# Altium PCB NS6202_V4.0_b.PcbDoc
Units mm, origin at the board's own origin, x right, y up, seen from the top; angles counter-clockwise.
Board outline 66 x 66 mm, 4 copper layers (Top, PWR, GND, Bottom), stack 0.776 mm thick; 111 components, 136 nets, 475 pads, 226 vias.
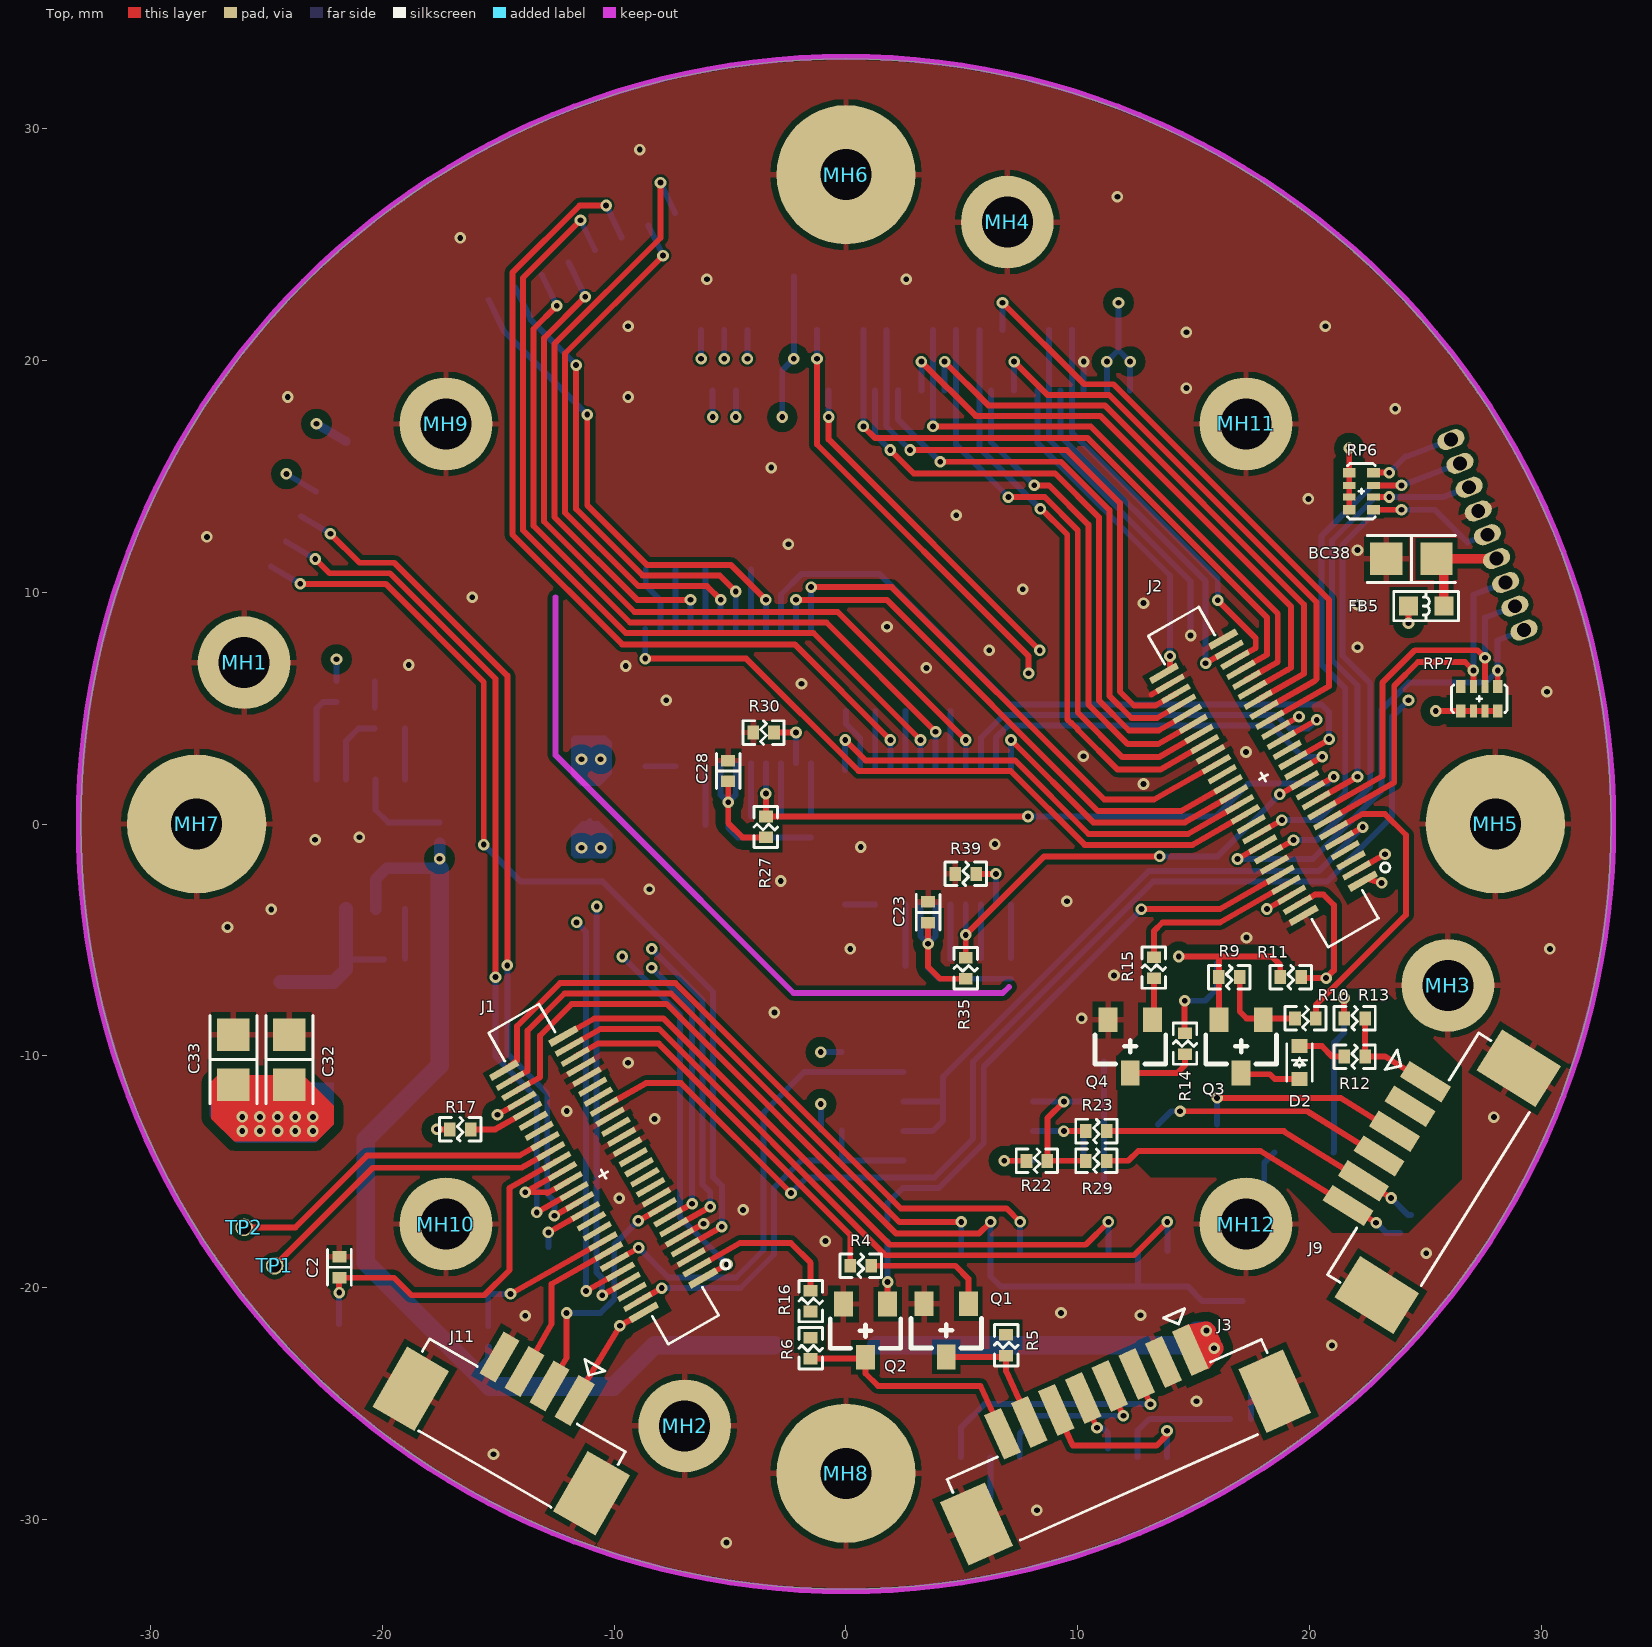
[diagram p0: Top view]
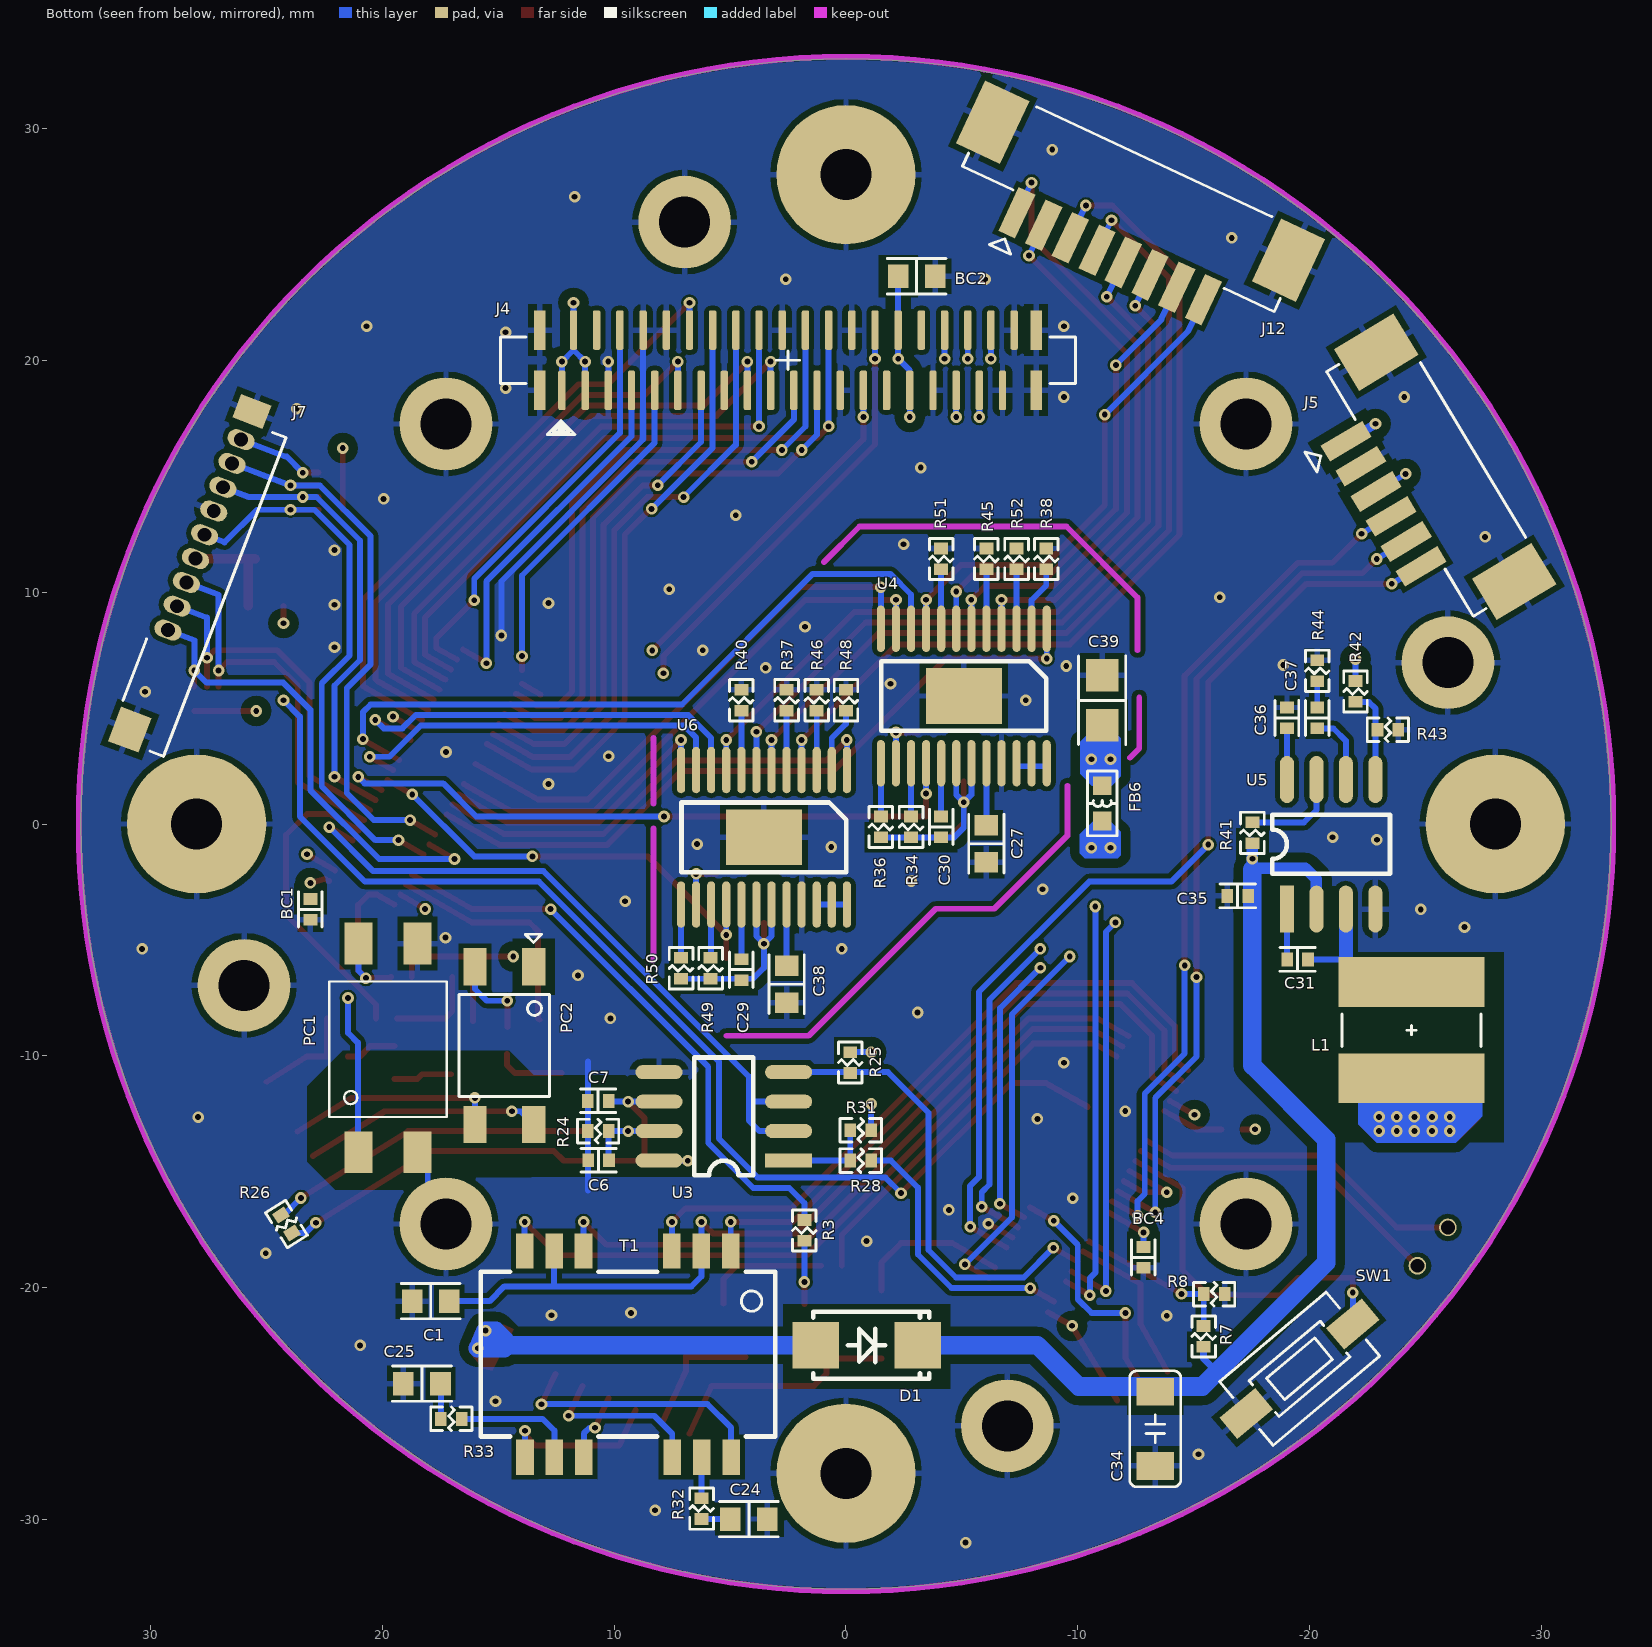
[diagram p1: Bottom view, seen from below]
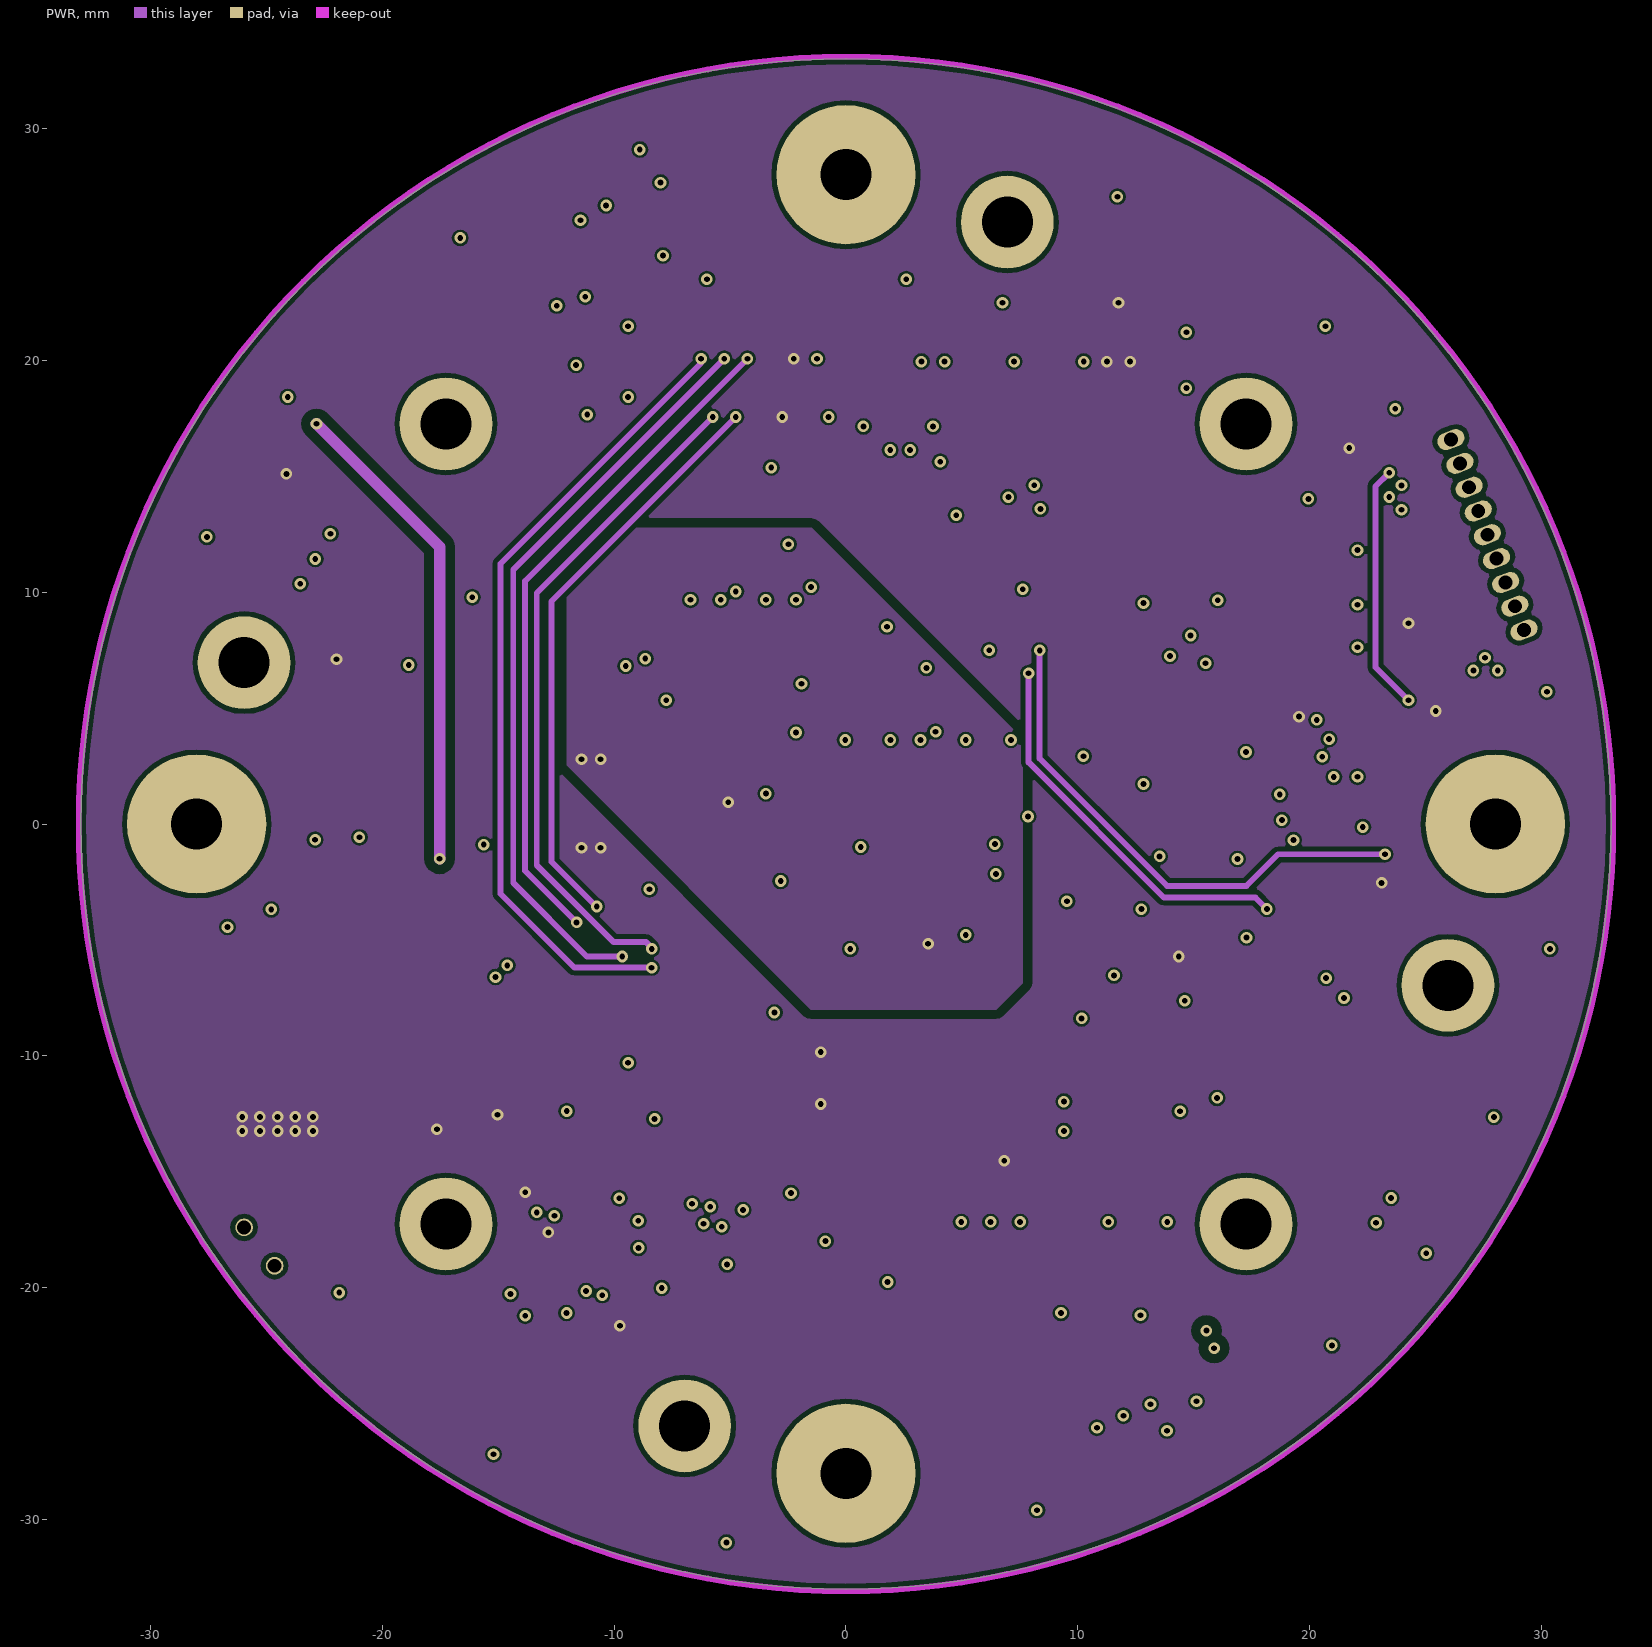
[diagram p2: PWR]
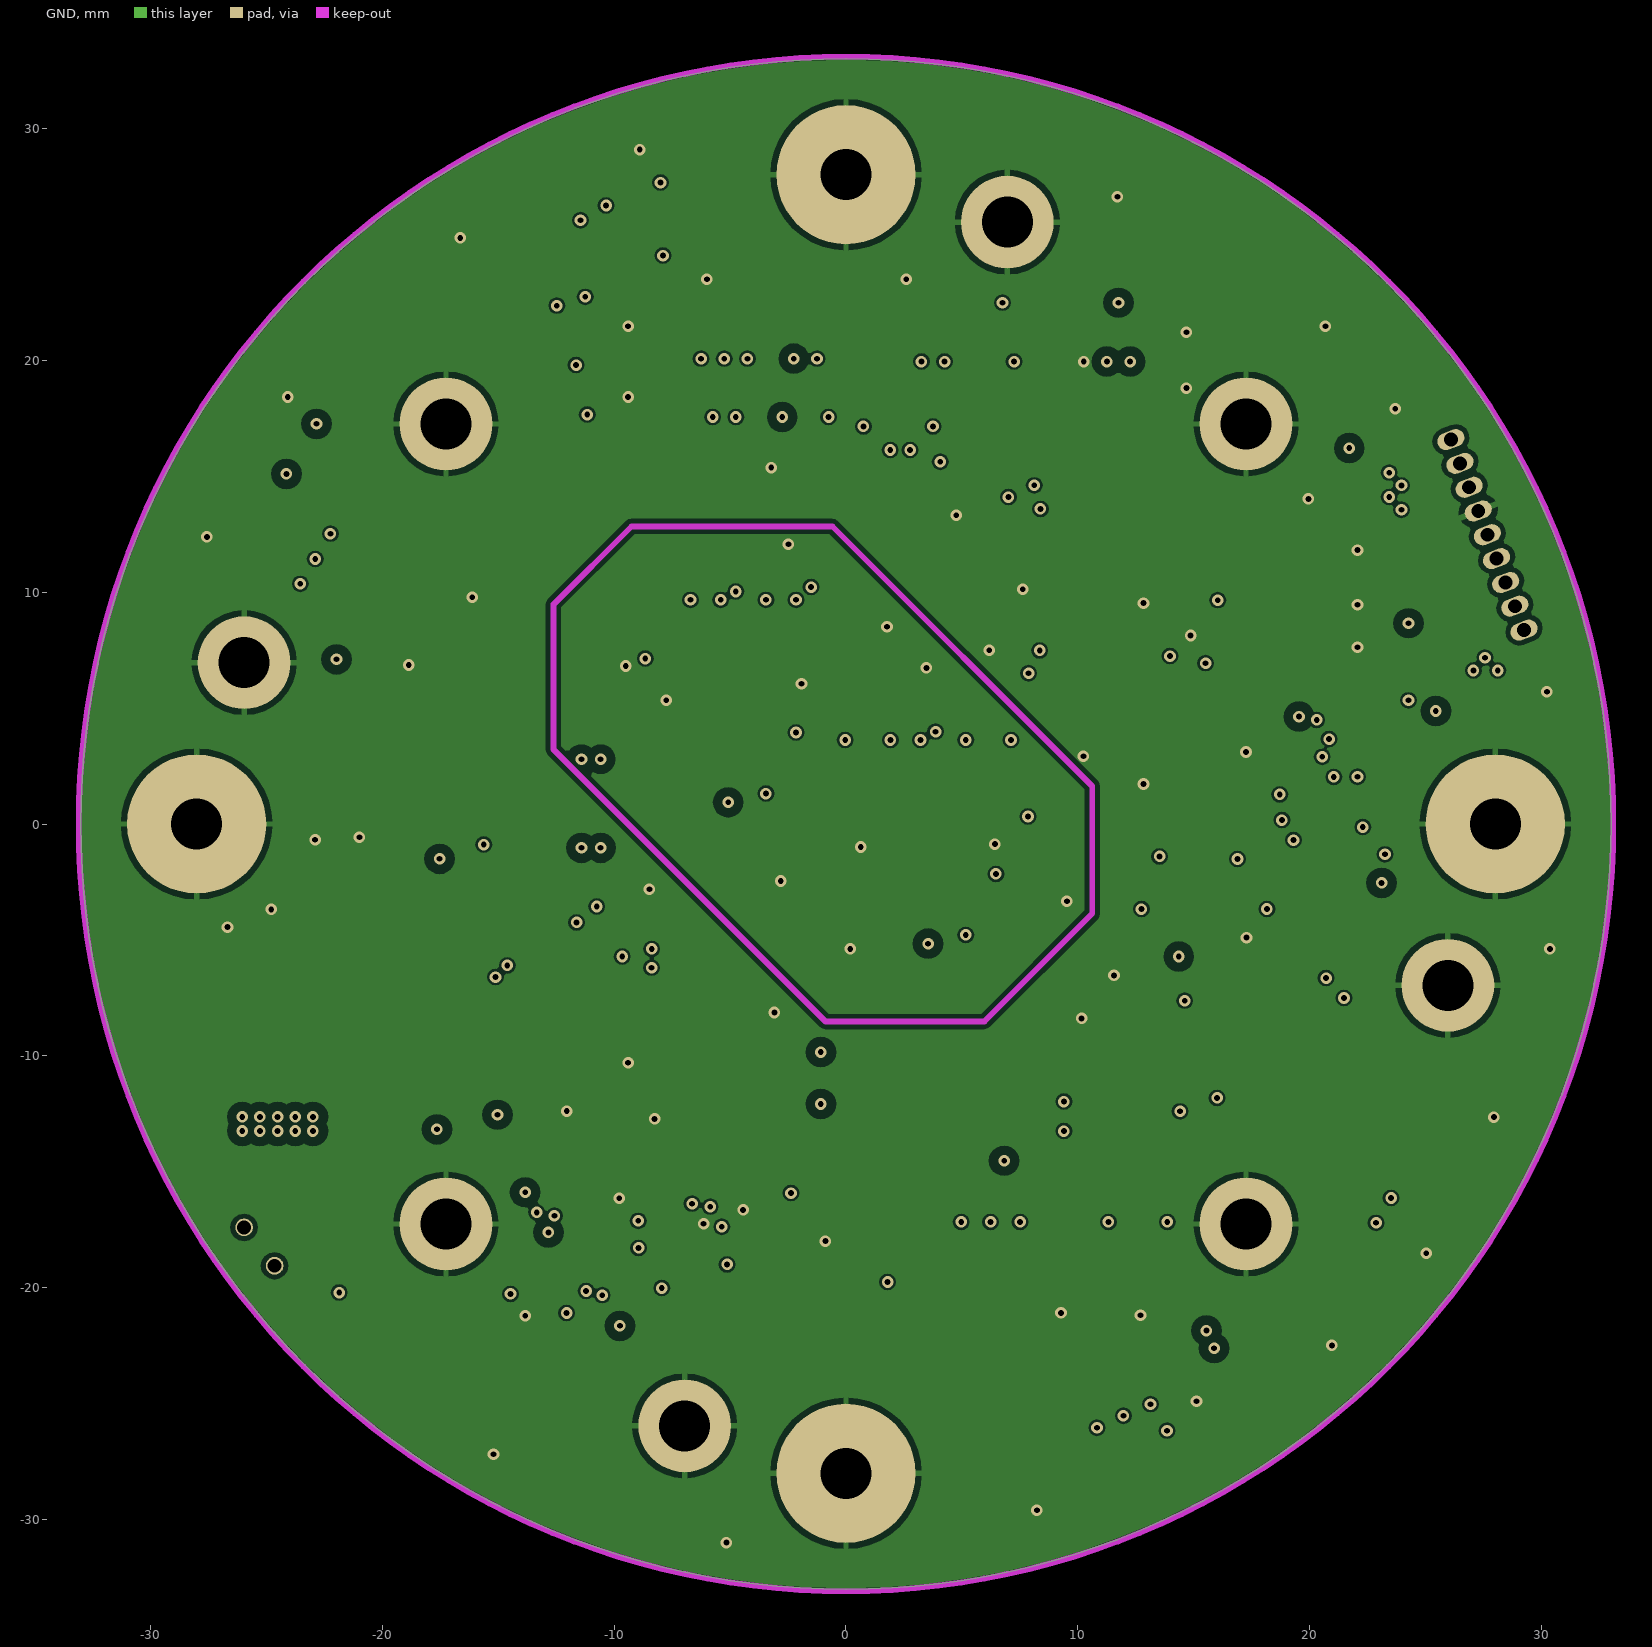
[diagram p3: GND]

## Layer stack, top to bottom
Solder Mask Top: solder mask 0.0102, Solder Resist, Dk 3.5
Top: signal copper 0.0343
Dielectric 1: core 0.254, FR-4, Dk 4.2
PWR: signal copper 0.036
Dielectric 3: prepreg 0.127, Dk 4.2
GND: signal copper 0.036
Dielectric 2: core 0.254, Dk 4.2
Bottom: signal copper 0.0343
Solder Mask Bottom: solder mask 0.0102, Solder Resist, Dk 3.5

## Board outline
-33,0 ccw(c0,0) 0,-33 ccw(c0,0) 33,0 ccw(c0,0) 0,33 ccw(c0,0)

## Design rules (kind name [scope] priority, off if disabled: settings)
Clearance Clearance_4 [OnLayer('Keep-Out Layer') vs InNet('GND')] p1: gap=0.001 ignorepadtopadclearanceinfootprint=FALSE except(0: Arc-Hole Track-Hole SMDPad-Hole THPad-Hole Via-Hole Fill-Hole Poly-Hole Region-Hole Text-Hole)
Clearance Clearance_3 [IsRegion vs (InNet('+12V') OR InNet('+12V_POE') OR InNet('+3.3V')OR InNet('+1.8V') or Innet('+5.0V')or Innet('N17346698') or Innet('N17371906') or Innet('MVDD'))] p2: gap=0.4 ignorepadtopadclearanceinfootprint=FALSE except(0: Arc-Hole Track-Hole SMDPad-Hole THPad-Hole Via-Hole Fill-Hole Poly-Hole Region-Hole Text-Hole)
Clearance Clearance_2 [(InComponent('RP6') OR InComponent('RP7'))] p3: gap=0.16 ignorepadtopadclearanceinfootprint=FALSE except(0: Arc-Hole Track-Hole SMDPad-Hole THPad-Hole Via-Hole Fill-Hole Poly-Hole Region-Hole Text-Hole)
Clearance Clearance_1 [IsVia] p4: gap=0.1 ignorepadtopadclearanceinfootprint=FALSE except(0: Arc-Hole Track-Hole SMDPad-Hole THPad-Hole Via-Hole Fill-Hole Poly-Hole Region-Hole Text-Hole)
Clearance [All] p5: gap=0.2 ignorepadtopadclearanceinfootprint=FALSE except(0: Arc-Hole Track-Hole SMDPad-Hole THPad-Hole Via-Hole Fill-Hole Poly-Hole Region-Hole Text-Hole)
ComponentClearance ComponentClearance_1 [(InComponent('J1') or InComponent('J2') or InComponent('J3') or InComponent('J4') or InComponent('J5') or InComponent('J7') or InComponent('J9') or InComponent('J11') or InComponent('J12') or InComponent('SW1'))] p1: gap=0 collisioncheckmode=3 verticalgap=0 showdistances=FALSE
ComponentClearance [All] p2: gap=0.1 collisioncheckmode=3 verticalgap=0 showdistances=FALSE
HoleSize [All] p1: absolutevalues=TRUE maxlimit=3.27 minlimit=0.025 maxpercent=80.000 minpercent=20.000
HoleToHoleClearance [All] p1: gap=0.01 allowstackedmicrovias=TRUE
MinimumSolderMaskSliver [All] p1: minsoldermaskwidth=0.01
PlaneConnect "Power Plane Connect Style - pads with no thermal_2" [(Name='U44-1') Or (Name='U45-1') Or (Name='U46-1') Or (Name='U47-1') Or (Name='U48-1') Or (Name='U49-1') Or (Name='U50-1') Or (Name='U51-1') Or (Name='U52-1') Or (Name='U55-1') Or (Name='U56-1') Or (Name='U57-1') Or (Name='U58-1') Or (Name='U6-1') Or (Name='U7-1') Or (Name='U8-1') Or (Name='U9-1')] p1: planeconnectstyle=NoConnect reliefexpansion=0.508 reliefentries=4 reliefconductorwidth=0.254 reliefairgap=0.254 // PAD - No Thermal Connect Rule
PlaneConnect "Power Plane Connect Style - pads with no thermal" [(Name='J10-0') Or (Name='J10-0/2') Or (Name='J11-0') Or (Name='J11-0/2') Or (Name='J13-6') Or (Name='J13-7') Or (Name='J2-13') Or (Name='J2-14') Or (Name='J4-15') Or (Name='J4-16') Or (Name='J6-5') Or (Name='J6-6') Or (Name='J6-9') Or (Name='J6-10') Or (Name='LS1-5') Or (Name='LS1-6') Or (Name='LS1-7') Or (Name='SW1-1') Or (Name='SW1-4') Or (Name='U10-1') Or (Name='U11-1') Or (Name='U12-1') Or (Name='U13-1') Or (Name='U14-1') Or (Name='U15-1') Or (Name='U16-1') Or (Name='U17-1') Or (Name='U18-1') Or (Name='U19-1') Or (Name='U20-1') Or (Name='U21-1') Or (Name='U22-1') Or (Name='U23-1') Or (Name='U24-1') Or (Name='U25-1') Or (Name='U26-1') Or (Name='U27-1') Or (Name='U28-1') Or (Name='U29-1') Or (Name='U30-1') Or (Name='U31-1') Or (Name='U32-1') Or (Name='U33-1') Or (Name='U34-1') Or (Name='U35-1') Or (Name='U36-1') Or (Name='U37-1') Or (Name='U38-1') Or (Name='U39-1') Or (Name='U40-1') Or (Name='U41-1') Or (Name='U42-1') Or (Name='U43-1')] p2: planeconnectstyle=NoConnect reliefexpansion=0.508 reliefentries=4 reliefconductorwidth=0.254 reliefairgap=0.254 // PAD - No Thermal Connect Rule
PlaneConnect [All] p3: planeconnectstyle=Relief reliefexpansion=0.508 reliefentries=4 reliefconductorwidth=0.254 reliefairgap=0.254
PolygonConnect PolygonConnect_1 [isVia] p1: connectstyle=Direct reliefconductorwidth=0.254 reliefentries=4 polygonreliefangle="90 Angle" airgapwidth=0.254
PolygonConnect [All] p2: connectstyle=Relief reliefconductorwidth=0.254 reliefentries=4 polygonreliefangle="90 Angle" airgapwidth=0.254
RoutingVias [All] p1: holewidth=0.25 width=0.5 viastyle="Through Hole" minholewidth=0.25 minwidth=0.5 maxholewidth=0.25 maxwidth=0.5
SilkToBoardRegionClearance [All] p1 off:
SilkToSilkClearance [All] p1: silktosilkclearance=0.01
SilkToSolderMaskClearance SilkToSolderMaskClearance_1 [OnLayer('Multi-Layer')] p1: minsilkscreentomaskgap=0 clearancetoexposedcopper=TRUE
SilkToSolderMaskClearance [IsPad] p2: minsilkscreentomaskgap=0.01 clearancetoexposedcopper=TRUE
SolderMaskExpansion [All] p1: expansion=0.102
UnRoutedNet [All] p1: checkbadconnections=TRUE
Width Width_2 [InNet('VDD_3.3V')  or InNet('VDD_5.0V')] p1: maxlimit=3 minlimit=0.254 preferedwidth=2.4
Width Width_1 [InNet('+12V')] p2: maxlimit=1 minlimit=0.3 preferedwidth=0.5
Width [All] p3: maxlimit=1 minlimit=0.254 preferedwidth=0.254
21 further rules are at their usual default settings.

## Components (designator, comment, footprint, x,y, rotation, side; value= is the part's Value field where it differs from the comment)
BC1 "0.1uF" CS-1005 23.097,-3.683 r90 bottom
BC2 "0.1uF" CS-1608 -3.048,23.622 r0 bottom
BC4 "0.1uF" CS-1005 -12.824,-18.691 r90 bottom
BC38 "22uF" CS-2012 24.384,11.43 r0 top
C1 "0.1uF" CS-1608 17.907,-20.574 r0 bottom
C2 "1nF/NI" CS-1005 -21.844,-19.115 r90 top
C6 "2.2nF" CS-1005 10.668,-14.502 r180 bottom
C7 "2.2nF" CS-1005 10.689,-11.938 r180 bottom
C23 "0.1uF" CS-1005 3.538,-3.81 r90 top
C24 "0.1uF" CS-1608 4.191,-29.972 r180 bottom
C25 "0.1uF" CS-1608 18.287,-24.13 r0 bottom
C27 "2.2uF" CS-1608 -6.055,-0.851 r270 bottom
C28 "0.1uF" CS-1005 -5.08,2.286 r90 top
C29 "10nF" CS-1005 4.513,-6.281 r270 bottom
C30 "10nF" CS-1005 -4.105,-0.127 r270 bottom
C31 "10nF" CS-1005 -19.471,-5.842 r180 bottom
C32 "22uF-2012-6.3V" CS-2012 -24.003,-10.16 r90 top
C33 "22uF-2012-6.3V" CS-2012 -26.416,-10.16 r90 top
C34 "4.7uF-25V" C3216 -13.335,-26.081 r270 bottom
C35 "0.1uF" CS-1005 -16.891,-3.102 r0 bottom
C36 "0.1uF" CS-1005 -19.016,4.572 r90 bottom
C37 "3.3nF" CS-1005 -20.32,4.572 r90 bottom
C38 "2.2uF" CS-1608 2.563,-6.909 r270 bottom
C39 "22uF" CS-2012 -11.049,5.334 r90 bottom
D1 "RB051L-40" SOD-106 -0.889,-22.479 r180 bottom
D2 "1N4148" SOD-523 19.558,-10.287 r270 top
FB5 "60" LS-1608 25.019,9.398 r0 top
FB6 "60" LS-1608 -11.049,0.889 r270 bottom
J1 "AXK6F30547" AXK6F50547 -10.451,-15.098 r120 top locked
J2 "AXK6F50347" AXK6F50547 18.001,2.021 r120 top locked
J3 "12505WS-08" 12505WS-8P#1 11.43,-25.908 r24 top
J4 "05005HS-40" 05005HS-40P 2.5,20 r180 bottom
J5 "12505WS-06" 12505WS-6P -24.511,14.605 r239 bottom
J7 "CON_u-SD/NI" CON_U-SD-RU 29.237,8.359 r111 bottom
J9 "12505WS-06" 12505WS-6P 24.638,-14.605 r238 top
J11 "12505WS-4P//NI" 12505WS-4P -14.097,-25.266 r330 top
J12 "12505WS-08" 12505WS-8P#2 -12.047,25.885 r205 bottom
L1 "CDRH5D18NP-100NC-10uH" CDRH5D18NP -24.384,-8.89 r0 bottom
MH1 "4.04pi" VA-2.2 -25.954,6.954 r0 top locked
MH2 "4.04pi" VA-2.2 -6.954,-25.954 r0 top locked
MH3 "4.04pi" VA-2.2 25.954,-6.954 r0 top locked
MH4 "4.04pi" VA-2.2 6.954,25.954 r0 top locked
MH5 "4.04pi" VA-2.2-W 28,0 r0 top locked
MH6 "4.04pi" VA-2.2-W 0,28 r0 top locked
MH7 "4.04pi" VA-2.2-W -28,0 r0 top locked
MH8 "4.04pi" VA-2.2-W 0,-28 r0 top locked
MH9 "4.04pi" VA-2.2 -17.25,17.25 r0 top locked
MH10 "4.04pi" VA-2.2 -17.25,-17.25 r0 top locked
MH11 "4.04pi" VA-2.2 17.25,17.25 r0 top locked
MH12 "4.04pi" VA-2.2 17.25,-17.25 r0 top locked
PC1 "PC817" PC817 19.812,-9.652 r90 bottom
PC2 "ASSR-4118" ASSR-4118 14.732,-9.554 r0 bottom
Q1 "MMBT6427" SOT-23 4.318,-21.844 r270 top
Q2 "MMBT6427" SOT-23 0.836,-21.855 r270 top
Q3 "MMBT3906" SOT-23 17.033,-9.598 r270 top
Q4 "MMBT6427" SOT-23 12.254,-9.598 r270 top
R3 "10K" RS-1005#1 1.795,-17.526 r90 bottom
R4 "10K" RS-1005#1 0.635,-19.05 r180 top
R5 "1K" RS-1005#1 6.904,-22.479 r270 top
R6 "1K" RS-1005#1 -1.524,-22.606 r270 top
R7 "10K" RS-1005#1 -15.421,-22.098 r270 bottom
R8 "10K" RS-1005#1 -15.875,-20.272 r180 bottom
R9 "10K" RS-1005#1 16.528,-6.604 r0 top
R10 "1K" RS-1005#1 19.812,-8.38 r180 top
R11 "10K" RS-1005#1 19.177,-6.604 r180 top
R12 "330" RS-1005#1 21.935,-10.033 r180 top
R13 "2.2K" RS-1005#1 21.935,-8.382 r180 top
R14 "330" RS-1005#1 14.618,-9.47 r270 top
R15 "1K" RS-1005#1 13.276,-6.196 r270 top
R16 "10K" RS-1005#1 -1.524,-20.574 r270 top
R17 "10K" RS-1005#1 -16.637,-13.166 r180 top
R22 "10K" RS-1005#1 8.233,-14.524 r180 top
R23 "47" RS-1005#1 10.795,-13.242 r0 top
R24 "10K" RS-1005#1 10.689,-13.242 r180 bottom
R25 "10K" RS-1005#1 -0.185,-10.287 r90 bottom
R26 "120/NI" RS-1005#1 24.13,-17.25 r58 bottom
R27 "4.7K" RS-1005#1 -3.455,-0.127 r270 top
R28 "10K" RS-1005#2 -0.635,-13.208 r0 bottom
R29 "47" RS-1005#1 10.795,-14.524 r0 top
R30 "0" RS-1005#1 -3.556,3.944 r0 top
R31 "100" RS-1005#1 -0.635,-14.512 r0 bottom
R32 "75" RS-1005#1 6.23,-29.522 r90 bottom
R33 "75" RS-1005#1 17.018,-25.654 r180 bottom
R34 "1K" RS-1005#1 -2.805,-0.127 r90 bottom
R35 "4.7K" RS-1005#1 5.163,-6.223 r270 top
R36 "1K" RS-1005#1 -1.505,-0.127 r90 bottom
R37 "9.1_F" RS-1005#1 2.563,5.334 r90 bottom
R38 "100" RS-1005#1 -8.636,11.43 r270 bottom
R39 "0" RS-1005#1 5.163,-2.152 r0 top
R40 "9.1_F" RS-1005#1 4.513,5.334 r90 bottom
R41 "100K" RS-1005#1 -17.526,-0.381 r90 bottom
R42 "26.1K_1%" RS-1005#1 -21.971,5.715 r270 bottom
R43 "10K_1%" RS-1005#1 -23.368,4.064 r0 bottom
R44 "2.2K" RS-1005#1 -20.32,6.604 r270 bottom
R45 "9.1_F" RS-1005#1 -6.055,11.43 r90 bottom
R46 "100" RS-1005#1 1.263,5.334 r270 bottom
R48 "100" RS-1005#1 0,5.334 r270 bottom
R49 "1K" RS-1005#1 5.842,-6.223 r90 bottom
R50 "1K" RS-1005#1 7.113,-6.223 r90 bottom
R51 "9.1_F" RS-1005#1 -4.105,11.43 r90 bottom
R52 "100" RS-1005#1 -7.355,11.43 r270 bottom
RP6 "10K" RP-4_1005 22.226,14.351 r270 top
RP7 "10K" RP-4_1005 27.305,5.4 r0 top
SW1 "SW PB" SWS-CTT-1131U -19.558,-23.495 r140 bottom
T1 "TRC41604NL" TRC41604NL 9.405,-22.86 r0 bottom
TP1 "TP" TP -24.638,-19.05 r90 top
TP2 "TP" TP -25.954,-17.392 r90 top
U3 "MAX3485ESA" SOIC-8 5.255,-12.573 r90 bottom
U4 "DRV8834PWP" TSSOP-24-PAD -5.08,5.522 r270 bottom
U5 "MP1482" SOIC-8 -20.955,-0.889 r180 bottom
U6 "DRV8834PWP" TSSOP-24-PAD 3.538,-0.574 r270 bottom

## Footprints (in the part's own frame and the unit in brackets; to place one, negate y for a bottom-side part, rotate by r counter-clockwise, add the part's x,y. Pads: shape width x height; smd on the part's side, far side on the other; paste and mask are expansions set on the pad)
05005HS-40P [mm]
  rrect50% 0.32x1.7 smd: 1(-9.75,-1.3) 2(-9.25,1.3) 3(-8.75,-1.3) 4(-8.25,1.3) 5(-7.75,-1.3) 6(-7.25,1.3) 7(-6.75,-1.3) 8(-6.25,1.3) 9(-5.75,-1.3) 10(-5.25,1.3) 11(-4.75,-1.3) 12(-4.25,1.3) 13(-3.75,-1.3) 14(-3.25,1.3) 15(-2.75,-1.3) 16(-2.25,1.3) 17(-1.75,-1.3) 18(-1.25,1.3) 19(-0.75,-1.3) 20(-0.25,1.3) 21(0.25,-1.3) 22(0.75,1.3) 23(1.25,-1.3) 24(1.75,1.3) 25(2.25,-1.3) 26(2.75,1.3) 27(3.25,-1.3) 28(3.75,1.3) 29(4.25,-1.3) 30(4.75,1.3) 31(5.25,-1.3) 32(5.75,1.3) 33(6.25,-1.3) 34(6.75,1.3) 35(7.25,-1.3) 36(7.75,1.3) 37(8.25,-1.3) 38(8.75,1.3) 39(9.25,-1.3) 40(9.75,1.3)
  rect 0.5x1.7 smd: M1(-10.7,1.3) M2(-10.7,-1.3) M3(10.7,1.3) M4(10.7,-1.3)
  silkscreen extent -12.4,-3.2 12.4,1
12505WS-4P [mm]
  rect 0.8x2.1 smd: 1(1.875,1.55) 2(0.625,1.55) 3(-0.625,1.55) 4(-1.875,1.55)
  rect 2.1x3 smd: 5(-4.5,-1.55) 6(4.5,-1.55)
  silkscreen extent -4.87,-2.95 4.87,3.3
12505WS-6P [mm]
  rect 0.8x2.1 smd: 1(-3.145,-1.55) 2(-1.895,-1.55) 3(-0.625,-1.55) 4(0.625,-1.55) 5(1.895,-1.55) 6(3.145,-1.55)
  rect 2.1x3 smd: M1(-5.77,1.55) M2(5.77,1.55)
  silkscreen extent -6.14,-3.31 6.15,2.95
12505WS-8P#1 [mm]
  rect 0.8x2.1 smd: 1(4.435,1.55) 2(3.165,1.55) 3(1.895,1.55) 4(0.625,1.55) 5(-0.625,1.55) 6(-1.895,1.55) 7(-3.165,1.55) 8(-4.435,1.55)
  rect 2.1x3 smd: 9(7.04,-1.55) 10(-7.04,-1.55)
  silkscreen extent -7.41,-2.95 7.42,3.29
12505WS-8P#2 [mm]
  rect 0.8x2.1 smd: 1(-4.435,-1.55) 2(-3.165,-1.55) 3(-1.895,-1.55) 4(-0.625,-1.55) 5(0.625,-1.55) 6(1.895,-1.55) 7(3.165,-1.55) 8(4.435,-1.55)
  rect 2.1x3 smd: 9(-7.04,1.55) 10(7.04,1.55)
  silkscreen extent -7.42,-3.29 7.41,2.95
ASSR-4118 [mm]
  rect 1x1.6 smd: 1(-1.27,-3.4) 2(1.27,-3.4) 3(1.27,3.4) 4(-1.27,3.4)
  silkscreen extent -1.95,-4.8 1.95,2.2
AXK6F50547 [mm]
  rect 0.3x1.35 smd: 1(-6.025,-1.475) 2(-6.025,1.475) 49(6.025,-1.475) 50(6.025,1.475)
  rect 0.25x1.35 smd: 3(-5.5,-1.475) 4(-5.5,1.475) 5(-5,-1.475) 6(-5,1.475) 7(-4.5,-1.475) 8(-4.5,1.475) 9(-4,-1.475) 10(-4,1.475) 11(-3.5,-1.475) 12(-3.5,1.475) 13(-3,-1.475) 14(-3,1.475) 15(-2.5,-1.475) 16(-2.5,1.475) 17(-2,-1.475) 18(-2,1.475) 19(-1.5,-1.475) 20(-1.5,1.475) 21(-1,-1.475) 22(-1,1.475) 23(-0.5,-1.475) 24(-0.5,1.475) 25(0,-1.475) 26(0,1.475) 27(0.5,-1.475) 28(0.5,1.475) 29(1,-1.475) 30(1,1.475) 31(1.5,-1.475) 32(1.5,1.475) 33(2,-1.475) 34(2,1.475) 35(2.5,-1.475) 36(2.5,1.475) 37(3,-1.475) 38(3,1.475) 39(3.5,-1.475) 40(3.5,1.475) 41(4,-1.475) 42(4,1.475) 43(4.5,-1.475) 44(4.5,1.475) 45(5,-1.475) 46(5,1.475) 47(5.5,-1.475) 48(5.5,1.475)
  silkscreen extent -7.75,-2.8 7.75,1.25
C3216 [mm]
  rect 1.2x1.6 smd: 1(-1.6,0) 2(1.6,0)
  silkscreen extent -2.5,-1.1 2.5,1.1
CDRH5D18NP [mm]
  rect 6.3x2.15 smd: 1(0,-2.075) 2(0,2.075)
  silkscreen extent -3,-0.7 3,0.7
CON_U-SD-RU [mm]
  oval 0.75x1.2 hole 0.6: 1(0,0) 2(1.105,0) 3(2.201,0) 4(3.303,0) 5(4.407,0) 6(5.504,0) 7(6.6,0) 8(7.705,0)
  rect 1.1x1.4 smd: 9(10.1,0)
  rect 1.6x1.4 smd: 10(-4.596,0)
  oval 0.75x1.2 hole 0.6 mask+0.102: CD(8.801,0)
  silkscreen extent -5.15,-1.78 9.58,0.73
CS-1005 [mm]
  rect 0.5x0.6 smd: 1(-0.45,0) 2(0.45,0)
  silkscreen extent -0.76,-0.51 0.76,0.51
CS-1608 [mil]
  rect 35x40 smd: 1(-31.5,0) 2(31.5,0)
  silkscreen extent -50,-30 50,30
CS-2012 [mil]
  rect 55x55 smd: 1(-42.5,0) 2(42.5,0)
  silkscreen extent -75,-40 75,40
LS-1608 [mil]
  rect 32x32 smd: 1(-30,0) 2(30,0)
  silkscreen extent -55,-25 55,25
PC817 [mm]
  rect 1.8x1.2 smd: 1(-4.506,1.208) 2(-4.506,-1.332) 3(4.494,-1.332) 4(4.494,1.208)
  silkscreen extent -2.98,-2.6 2.86,2.48
RP-4_1005 [mm]
  rect 0.406x0.55 smd: 1(-0.8,0.525) 2(-0.8,-0.525) 7(0.8,0.525) 8(0.8,-0.525)
  rect 0.305x0.55 smd: 3(-0.25,0.525) 4(-0.25,-0.525) 5(0.25,0.525) 6(0.25,-0.525)
  silkscreen extent -1.2,-0.6 1.2,0.6
RS-1005#1 [mm]
  rect 0.5x0.6 smd: 1(-0.45,0) 2(0.45,0)
  silkscreen extent -0.89,-0.51 0.89,0.51
RS-1005#2 [mm]
  rect 0.5x0.6 smd: 1(0.45,0) 2(-0.45,0)
  silkscreen extent -0.89,-0.51 0.89,0.51
SOD-106 [mm]
  rrect0% 2x2 smd: 1(-2.2,0) 2(2.2,0)
  silkscreen extent -2.3,-1.45 2.7,1.45
SOD-523 [mm]
  rect 0.6x0.7 smd: 1(0.71,0) 2(-0.71,0)
  silkscreen extent -0.8,-0.55 0.8,0.55
SOIC-8 [mil]
  rect 24x80 smd: 1(-76.34,-109.45)
  oval 24x80 smd: 2(-26.34,-109.45) 3(23.66,-109.45) 4(73.66,-109.45) 5(73.66,110.55) 6(23.66,110.55) 7(-26.34,110.55) 8(-76.34,110.55)
  silkscreen extent -101,-49 99,51
SOT-23 [mil]
  rect 42x32 smd: 1(-45.45,37.75) 2(-45.45,-37.35) 3(44.85,0.2)
  silkscreen extent -20,-60 30,60
SWS-CTT-1131U [mm]
  rect 2x1.2 smd: 1(-3,0) 2(3,0)
  silkscreen extent -3,-1.8 3,1.8
TP [mil]
  round 30 hole 23.62: 1(0,0)
TRC41604NL [mm]
  rect 0.76x1.52 smd: 1(-4.436,-4.445) 2(-3.168,-4.445) 3(-1.898,-4.445) 6(1.912,-4.445) 7(3.182,-4.445) 8(4.452,-4.445) 9(4.438,4.445) 10(3.168,4.445) 11(1.898,4.445) 14(-1.912,4.445) 15(-3.182,4.445) 16(-4.452,4.445)
  silkscreen extent -6.35,-3.56 6.35,3.56
TSSOP-24-PAD [mm] "TSOP, 16-Leads, Body 5x4.4mm, Pitch 0.65mm, IPC Low Density"
  oval 2x0.35 smd: 1(-2.9,3.575) 2(-2.9,2.925) 3(-2.9,2.275) 4(-2.9,1.625) 5(-2.9,0.975) 6(-2.9,0.325) 7(-2.9,-0.325) 8(-2.9,-0.975) 9(-2.9,-1.625) 10(-2.9,-2.275) 11(-2.9,-2.925) 12(-2.9,-3.575) 13(2.9,-3.575) 14(2.9,-2.925) 15(2.9,-2.275) 16(2.9,-1.625) 17(2.9,-0.975) 18(2.9,-0.325) 19(2.9,0.325) 20(2.9,0.975) 21(2.9,1.625) 22(2.9,2.275) 23(2.9,2.925) 24(2.9,3.575)
  rect 2.4x3.28 smd: 25(0,0)
  silkscreen extent -1.5,-3.56 1.5,3.56
VA-2.2 [mm]
  rrect100% 4x4 hole 2.2: 1(0,0)
VA-2.2-W [mm]
  rrect100% 6x6 hole 2.2: 1(0,0)

## Via types
v1: diameter 0.5, hole 0.25, Top to Bottom, tented both sides, 226 vias

## Nets (pads, with @x,y where several pads share a name; then routed paths per layer and width w, separated by ;. In a path a pad name is that pad's centre, name@x,y a point inside that pad or via, vN(x,y) a via of type N, cw(c..) or ccw(c..) an arc to the next point about the centre after c; other vN are vias at no path point)
+3.3V: BC1.2 BC2.2 BC4.2 C32.1 C33.1 FB5.1 FB6.2 J1.2 J1.22 J1.28 J1.30 J1.44 J2.1 J2.31 J4.1 J4.2 J4.3 J4.30 J4.31 J5.3 J11.1 L1.2 PC2.1 Q3.2 R5.1 R6.1 R9.1 R11.2 R16.2 R17.2 R22.2 R25.2 R28.2 R42.1 RP6.2 RP6.4 RP6.6 RP6.8 RP7.2 RP7.4 RP7.6 RP7.8 U3.8 | length 54
  Top w0.254: C33.1 -26.416,-12.248 v1(-26.035,-12.629) ; v1(-24.511,-12.629) -24.003,-12.121 C32.1 ; v1(-17.64,-13.166) R17.2 ; v1(-15.03,-12.536) J1.44 ; v1(-12.835,-17.613) J1.22 ; J1.30 v1(-13.835,-15.881) -12.895,-15.881 -12.868,-15.907 J1.28 ; J11.1 v1@-9.745,-21.644 ; v1(-9.751,-21.641) J1.2 ; v1(6.82,-14.523) 7.782,-14.523 R22.2 ; v1(14.351,-5.715) 16.078,-5.715 ; Q3.2@16.078,-8.498 16.078,-5.715 ; J2.31 v1(19.536,4.63) ; R11.2 18.727,-6.076 18.366,-5.715 16.078,-5.715 ; RP6.8 RP6.6 RP6.4 RP6.2 v1(21.701,16.209) ; J2.1 22.452,-2.366 v1(23.097,-2.54) ; v1(24.257,8.659) FB5.1 ; v1(25.436,4.875) RP7.2 RP7.4 RP7.6 RP7.8
  Bottom w0.254: v1(-24.511,-12.629) -24.384,-12.502 L1.2 ; v1(-24.131,15.096) J5.3 ; R42.1 v1(-21.971,7.102) ; v1(-12.835,-17.613) -12.835,-18.23 BC4.2 ; v1(-11.407,-1.027) -11.407,-0.231 FB6.2 ; v1(-2.75,17.55) J4.31 -2.75,19.566 v1(-2.25,20.066) J4.30 -2.25,23.62 BC2.2 ; R28.2 v1(-1.085,-12.072) ; v1(-1.085,-9.837) R25.2 ; v1(6.82,-14.523) 8.052,-14.523 U3.8 ; J4.3 v1(11.25,19.939) 11.75,20.439 ; v1(11.75,22.479) J4.2 11.75,20.439 ; J4.1 v1(12.25,19.939) 11.75,20.439
  other v1: -26.035,-13.238 -25.273,-13.238 -24.511,-13.238 -23.749,-13.238 -22.987,-13.238 -25.273,-12.629 -23.749,-12.629 -22.987,-12.629 -10.582,-1.027
+12V: C34.1 C35.1 D1.2 J5.1 R7.2 R41.1 U5.2 | length 68
  PWR w0.5: v1(-22.833,17.256) -17.523,11.946 v1(-17.523,-1.502)
  Bottom w0.3: -16.002,-23.622 -15.421,-23.041 R7.2
  Bottom w0.4: v1(-22.833,17.256) J5.1
  Bottom w0.5: U5.2 -20.286,-2.379 -19.812,-1.905 -17.526,-1.905 ; -17.526,-1.963 -17.526,-1.905 ; R41.1 -17.526,-1.905
  Bottom w0.8: -17.526,-1.963 -17.526,-10.414 -20.701,-13.589 -20.701,-18.923 -16.002,-23.622 -15.367,-24.257 -10.033,-24.257 -8.255,-22.479 D1.2
AIN: J1.39
AOUT: J1.31
DAC_OUT: J1.37
DI_CON0: J9.1 R12.1 R13.1 | length 4.6
  Top w0.254: R13.1 R12.1 23.248,-10.033 J9.1
DI_D0: J2.4 PC1.4 R11.1 | length 7.9
  Top w0.254: J2.4 20.226,-3.048 20.593,-3.048 21.035,-3.491 21.035,-6.313 v1(20.702,-6.646) 19.669,-6.646 R11.1
  Bottom w0.254: v1(20.702,-6.646) 21.02,-6.328 PC1.4
DI_TYPE: J2.11 R10.1 | length 13.2
  Top w0.254: R10.1 20.262,-7.805 24.147,-3.92 24.147,-0.476 23.239,0.433 22.269,0.433 J2.11
DO_COM_CON: J9.4 PC2.4 | length 10.3
  Top w0.254: v1(14.409,-12.388) 19.896,-12.388 J9.4
  Bottom w0.254: PC2.4 14.028,-12.388 v1(14.409,-12.388)
DO_CON0: J9.3 PC2.3 | length 9.2
  Top w0.254: v1(16.002,-11.811) 21.336,-11.811 J9.3
  Bottom w0.254: PC2.3 v1(16.002,-11.811)
DO_D0: J2.8 R15.1 | length 7.4
  Top w0.254: R15.1 13.276,-4.622 13.649,-4.25 16.129,-4.25 J2.8
EPHY_TRCT: C1.1 J1.46 T1.2 T1.7 | length 42.5
  Top w0.254: J1.46 -13.208,-10.926 -13.191,-10.909 -13.191,-9.126 -11.831,-7.766 -7.735,-7.766 2.152,-17.653 5.743,-17.653 v1(6.237,-17.159)
  Bottom w0.254: v1(6.237,-17.159) T1.2 6.237,-19.517 6.659,-19.939 12.587,-19.939 ; T1.7 12.587,-19.939 ; C1.1 15.367,-20.574 14.732,-19.939 12.587,-19.939
FD_SW: C2.1 J1.32 SW1.2 | length 15.9
  Top w0.254: v1(-21.856,-20.205) -21.856,-19.577 C2.1 -19.488,-19.565 -18.733,-20.32 -15.594,-20.32 -14.511,-19.237 -14.511,-15.69 ; -14.478,-15.671 J1.32
  Bottom w0.254: SW1.2 v1(-21.856,-20.205)
FOCUS_AN: J12.4 U6.6 | length 38
  Top w0.254: v1(-11.448,26.035) -13.932,23.551 -13.932,12.669 -9.499,8.236 -1.399,8.236 v1(3.213,3.624) ; v1@-11.439,26.026 v1@-11.43,26.035
  Bottom w0.254: v1(-11.448,26.035) J12.4 ; U6.6 v1(3.213,3.624)
FOCUS_AP: J12.3 U6.4 | length 39.3
  Top w0.254: v1(-10.344,26.67) -11.487,26.67 -14.386,23.771 -14.386,12.481 -9.652,7.747 -2.21,7.747 v1(1.913,3.624)
  Bottom w0.254: v1(-10.344,26.67) J12.3 ; U6.4 v1(1.913,3.624)
FOCUS_BN: J12.6 U6.7 | length 34.1
  Top w0.254: v1(-12.469,22.352) -13.478,21.343 -13.478,12.857 -9.311,8.69 -0.845,8.69 v1(3.863,3.982)
  Bottom w0.254: J12.6 v1(-12.469,22.352) ; U6.7 v1(3.863,3.982)
FOCUS_BP: J12.5 U6.9 | length 35.5
  Top w0.254: v1(-11.243,22.733) -13.024,20.952 -13.024,13.045 -9.123,9.144 -0.357,9.144 v1(5.163,3.624)
  Bottom w0.254: J12.5 v1(-11.243,22.733) ; U6.9 v1(5.163,3.624)
FOCUS_CTRL_CLK: J2.23 U6.11 | length 17.4
  Top w0.254: J2.23 v1(20.536,2.898)
  Bottom w0.254: U6.11 6.463,3.719 6.993,4.249 18.337,4.249 19.687,2.898 v1(20.536,2.898)
FOCUS_CTRL_DIR: J2.26 U6.12 | length 12.7
  Top w0.254: v1(7.113,3.624) 10.664,0.073 14.618,0.073 J2.26
  Bottom w0.254: U6.12@7.112,2.327 U6.12 v1(7.113,3.624)
FOCUS_CTRL_EN: J2.29 U6.10 | length 18.4
  Top w0.254: J2.29 v1(20.296,4.487)
  Bottom w0.254: U6.10 5.813,3.711 6.805,4.703 18.551,4.703 19.129,4.124 19.933,4.124 v1(20.296,4.487)
FOCUS_CTRL_NFAULT: J2.21 R35.1 U6.16 | length 19.6
  Top w0.254: R35.1 v1(5.163,-4.782) 8.549,-1.397 v1(13.522,-1.397) ; v1(18.703,1.274) J2.21
  Bottom w0.254: v1(5.163,-4.782) U6.16 ; v1(13.522,-1.397) 16.032,-1.397 v1(18.703,1.274)
FOCUS_CTRL_NSLEEP: J2.24 U6.1 | length 20.3
  Top w0.254: v1(-0.037,3.624) 0.847,2.74 7.293,2.74 10.461,-0.428 14.751,-0.428 J2.24
  Bottom w0.254: U6.1 v1(-0.037,3.624)
GND: BC1.1 BC2.1 BC4.1 BC38.1 C1.2 C2.2 C6.1 C7.1 C23.2 C24.2 C25.2 C27.2 C28.2 C32.2 C33.2 C34.2 C35.2 C36.2 C38.2 C39.2 J1.5 J1.9 J1.17 J1.27 J1.29 J1.33 J1.41 J1.43 J2.2 J2.12 J2.34 J2.48 J2.49 J3.2 J3.9 J3.10 J4.5 J4.8 J4.10 J4.15 J4.20 J4.25 J4.26 J4.33 J4.39 J4.40 J4.M1 J4.M2 J4.M3 J4.M4 J5.2 J5.M1 J5.M2 J7.6 J7.9 J7.10 J9.2 J9.M1 J9.M2 J11.4 J11.5 J11.6 J12.9 J12.10 MH1.1 MH2.1 MH3.1 MH4.1 MH5.1 MH6.1 MH7.1 MH8.1 MH9.1 MH10.1 MH11.1 MH12.1 PC1.2 PC1.3 Q1.2 Q2.2 Q4.2 R8.2 R24.1 R30.1 R37.2 R38.1 R39.1 R40.2 R43.1 R44.1 R45.2 R46.1 R48.1 R51.2 R52.1 SW1.1 U3.5 U4.21 U4.25 U5.4 U6.21 U6.25 | length 28.2
  Top w0.254: J1.9 v1(-6.139,-17.238) ; 13.168,5.584 J2.48
  Bottom w0.254: J4.8 8.75,16.578 14.859,10.469 v1(14.859,8.128) ; J4.5 v1(10.25,19.939) ; 11.118,-15.807 C6.1 11.118,-10.242 ; MH12.1 18.034,-16.466 18.034,-14.604 PC1.2
  other v1: -5.155,-30.988 8.233,-29.591 -15.199,-27.178 15.113,-24.896 20.955,-22.483 -13.835,-21.209 12.7,-21.186 9.271,-21.082 25.019,-18.508 -0.889,-17.984 -4.439,-16.639 -9.779,-16.139 -8.255,-12.718 27.94,-12.641 -12.044,-12.383 -9.398,-10.299 10.16,-8.382 -3.089,-8.128 11.557,-6.529 0.185,-5.387 30.353,-5.387 17.27,-4.9 -26.67,-4.445 -24.787,-3.683 9.525,-3.334 -8.48,-2.816 -2.818,-2.459 0.635,-0.991 6.42,-0.868 -22.895,-0.679 -20.982,-0.574 12.827,1.725 10.239,2.921 17.25,3.104 -7.749,5.334 30.226,5.702 -1.919,6.047 3.466,6.731 -9.499,6.813 -18.852,6.858 6.174,7.493 22.058,7.622 1.768,8.509 22.058,9.456 12.827,9.525 -16.114,9.779 7.623,10.127 22.058,11.811 -2.485,12.065 -27.559,12.381 4.75,13.317 19.939,14.019 -3.224,15.367 23.689,17.907 -24.071,18.415 -9.398,18.415 14.679,18.796 14.679,21.209 -9.398,21.463 20.672,21.463 -5.998,23.495 2.597,23.495 -16.637,25.273 11.704,27.051 -8.89,29.083
I2C_SCL: J1.24 J5.4 | length 37
  Top w0.254: v1(-22.234,12.518) -20.982,11.265 -19.475,11.265 -14.605,6.395 v1(-14.605,-6.096) ; v1(-12.574,-16.89) J1.24
  Bottom w0.254: J5.4 v1(-22.234,12.518) ; v1(-14.605,-6.096) -14.605,-9.899 -12.881,-11.623 -12.881,-15.954 -12.574,-16.261 v1(-12.574,-16.89)
I2C_SDA: J1.26 J5.5 | length 37
  Top w0.254: v1(-22.888,11.429) -22.27,10.811 -19.663,10.811 -15.113,6.261 v1(-15.113,-6.604) ; v1(-13.335,-16.747) J1.26
  Bottom w0.254: J5.5 v1(-22.888,11.429) ; v1(-15.113,-6.604) -15.113,-10.033 -13.335,-11.811 v1(-13.335,-16.747)
IR_PWM: J1.7 J5.6 | length 42.8
  Top w0.254: v1(-23.532,10.357) -19.851,10.357 -15.621,6.127 v1(-15.621,-0.889) ; J1.7 v1(-5.355,-17.368)
  Bottom w0.254: J5.6 v1(-23.532,10.357) ; v1(-15.621,-0.889) -14.025,-2.485 -10.49,-2.485 -5.731,-7.245 -5.731,-15.231 -5.355,-15.606 v1(-5.355,-17.368)
LED0: J3.7 Q1.3 R5.2 | length 5.6
  Top w0.254: Q1.3 R5.2@6.858,-22.983 ; R5.2 6.904,-23.6 J3.7
LED1: J3.8 Q2.3 R6.2 | length 10.5
  Top w0.254: R6.2 0.779,-23.056 Q2.3 0.841,-23.694 1.385,-24.238 5.799,-24.238 J3.8
LED_GN: J2.10 R3.2 | length 25.2
  Top w0.254: v1(12.74,-3.671) 16.133,-3.671 J2.10
  Bottom w0.254: R3.2 1.795,-16.345 2.445,-15.694 3.998,-15.694 5.938,-13.754 5.938,-10.473 v1(12.74,-3.671)
LED_MLINK: J1.45 R4.2 | length 16.8
  Top w0.254: J1.45 -10.687,-9.47 -8.07,-9.47 0.185,-17.725 R4.2
LENC_IRIS_PWM1: J2.30
LENC_IRIS_PWM2: J2.27
MVDD: C23.1 C28.1 C29.2 C30.2 C39.1 FB6.1 R27.2 R34.1 R35.2 R36.1 R49.1 R50.1 U4.18 U4.19 U6.18 U6.19 | length 24.4
  Top w0.254: C28.1 v1(-5.08,0.935) -5.08,0.039 -4.464,-0.577 R27.2 ; C23.1 v1(3.538,-5.161) 3.538,-6.155 4.057,-6.673 R35.2
  Bottom w0.254: U4.19 -5.405,1.26 v1(-5.08,0.935) ; U4.18 -4.755,1.26 v1(-5.08,0.935) ; R36.1 -4.666,-0.577 -5.08,-0.163 v1(-5.08,0.935) ; U6.19 3.213,-4.836 v1(3.538,-5.161) ; U6.18 3.863,-4.836 v1(3.538,-5.161) ; R50.1 4.007,-6.673 3.538,-6.205 v1(3.538,-5.161)
  other v1: -11.407,2.794 -10.582,2.794
N15229178: Q3.1 R9.2 R10.2 | length 4
  Top w0.254: R9.2 16.978,-8.088 17.27,-8.38 R10.2
N15229370: D2.1 Q3.3 | length 2.5
  Top w0.254: Q3.3@17.039,-10.791 18.284,-10.791 18.49,-10.997 D2.1@19.474,-10.997
N15229490: PC1.1 R13.2 | length 7.7
  Top w0.254: R13.2 21.474,-8.371 v1(21.474,-7.504) v1@21.485,-7.515
  Bottom w0.254: PC1.1 21.051,-14.127 21.051,-9.429 21.474,-9.006 v1(21.474,-7.504)
N16657531: D2.2 R12.2 | length 2.2
  Top w0.254: D2.2@19.474,-9.577 D2.2 20.518,-9.577 20.974,-10.033 R12.2
N16698572: Q4.3 R14.2 | length 3
  Top w0.254: Q4.3 14.278,-10.737 14.618,-10.397 R14.2
N17016752: R41.2 U5.7 | length 4.3
  Bottom w0.254: U5.7 -20.286,0.601 -19.754,0.069 R41.2
N17016775: C36.1 U5.8 | length 2.2
  Bottom w0.254: U5.8 C36.1
N17016804: C37.1 U5.6 | length 3.1
  Bottom w0.254: U5.6 -21.556,3.59 -21.024,4.122 C37.1
N17016806: C37.2 R44.2 | length 1.1
  Bottom w0.254: C37.2 R44.2
N17016820: R42.2 R43.2 U5.5 | length 4
  Bottom w0.254: U5.5 -22.826,4.987 -22.548,5.265 R42.2
N17016832: C31.2 L1.1 U5.3 | length 7.4
  Bottom w0.254: -21.556,-5.588 -21.302,-5.842 C31.2
  Bottom w0.6: L1.1 -22.1,-6.815 -21.556,-6.271 -21.556,-5.588 U5.3
N17334107: C6.2 R23.1 R24.2 U3.7 | length 4.4
  Top w0.254: v1(9.398,-13.242) R23.1
  Bottom w0.254: U3.7 v1(9.398,-13.242) R24.2 10.239,-14.48 C6.2
N17334109: R28.1 R31.2 U3.1 | length 4
  Bottom w0.254: R28.1 R31.2 U3.1
N17334111: C7.2 R22.1 R29.1 U3.6 | length 6.7
  Top w0.254: v1(9.398,-11.972) 8.683,-12.687 R22.1 R29.1
  Bottom w0.254: U3.6 v1(9.398,-11.972) 10.205,-11.972 C7.2 C7.2@10.218,-11.917
N17340800: PC2.2 R14.1 | length 3.9
  Top w0.254: 14.605,-8.759 v1(14.605,-7.62)
  Bottom w0.254: v1(14.605,-7.62) 15.494,-7.62 16.002,-7.112 PC2.2@16.002,-5.998
N17346161: C24.1 R32.1 | length 1.2
  Bottom w0.254: C24.1 R32.1
N17346163: C25.1 R33.1 | length 1.5
  Bottom w0.254: R33.1 C25.1@17.468,-24.15
N17347463: Q1.1 R4.1 | length 5.5
  Top w0.254: R4.1 4.718,-19.05 5.277,-19.609 Q1.1
N17347493: Q2.1 R3.1 | length 2.7
  Top w0.254: Q2.1 v1(1.795,-19.749)
  Bottom w0.254: v1(1.795,-19.749) R3.1
N17371906: D1.1 J3.1 | length 17.6
  Top w0.8: v1(15.542,-21.844) v1(15.875,-22.606)
  Bottom w0.8: D1.1 14.605,-22.479 14.732,-22.606 ; 14.732,-22.606 14.732,-22.225 15.113,-21.844 v1(15.542,-21.844) v1(15.875,-22.606) 14.732,-22.606
N17379738: BC38.2 FB5.2 J7.4 | length 4.7
  Top w0.254: BC38.2@25.781,11.252 BC38.2@25.971,11.442
  Top w0.4: BC38.2 25.476,11.442 25.971,11.442 J7.4 ; FB5.2 BC38.2@25.781,11.252
N17383042: R34.2 U4.15 | length 2.3
  Bottom w0.254: U4.15 -2.805,0.334 R34.2@-2.794,0.323
N17383730: R37.1 U6.5 | length 2.6
  Bottom w0.254: U6.5 R37.1
N17383732: R40.1 U6.8 | length 2.6
  Bottom w0.254: U6.8 R40.1
N17383734: R46.2 U6.3 | length 2.6
  Bottom w0.254: U6.3 R46.2@1.263,4.877
N17383736: R48.2 U6.2 | length 2.8
  Bottom w0.254: R48.2 0,4.318 0.613,3.705 U6.2
N17383752: U6.22 U6.23 U6.24 | length 1.3
  Bottom w0.254: U6.24 U6.23 U6.22
N17383760: C38.1 U6.20 | length 2.6
  Bottom w0.254: C38.1@2.563,-6.123 C38.1 U6.20
N17383762: R39.2 U6.14 | length 2.2
  Top w0.254: R39.2 v1(6.463,-2.152)
  Bottom w0.254: U6.14 v1(6.463,-2.152)
N17383772: R49.2 U6.15 | length 2.3
  Bottom w0.254: R49.2@5.813,-5.773 U6.15
N17383775: R50.2 U6.13 | length 2.3
  Bottom w0.254: R50.2 U6.13
N17383778: C29.1 U6.17 | length 2.4
  Bottom w0.254: C29.1 U6.17
N17383808: R45.1 U4.5 | length 2.6
  Bottom w0.254: U4.5 R45.1
N17383810: R51.1 U4.8 | length 2.6
  Bottom w0.254: U4.8 R51.1
N17383812: R52.2 U4.3 | length 2.6
  Bottom w0.254: U4.3 R52.2
N17383820: R38.2 U4.2 | length 2.8
  Bottom w0.254: R38.2 -8.636,10.287 -8.005,9.656 U4.2
N17383828: U4.22 U4.23 U4.24 | length 1.3
  Bottom w0.254: U4.24@-8.655,2.49 -8.005,2.49 U4.22@-7.355,2.49
N17383836: C27.1 U4.20 | length 2.5
  Bottom w0.254: C27.1 U4.20@-6.055,2.49
N17383838: R30.2 U4.14 | length 2.3
  Top w0.254: R30.2 v1(-2.155,3.944) v1@-2.162,3.937
  Bottom w0.254: U4.14 v1(-2.155,3.944)
N17383848: R36.2 U4.13 | length 2.3
  Bottom w0.254: R36.2 U4.13
N17383858: C30.1 U4.17 | length 2.3
  Bottom w0.254: C30.1 U4.17
N173250840: C31.1 U5.1 | length 2.1
  Bottom w0.254: C31.1@-19.016,-5.807 U5.1
N173253942: Q4.1 R15.2 | length 1.8
  Top w0.254: Q4.1 13.276,-8.38 R15.2
POE_LINE_1_2+: R32.2 T1.15 | length 1.8
  Bottom w0.254: R32.2@6.223,-29.072 T1.15
POE_LINE_3_6-: R33.2 T1.10 | length 5.3
  Bottom w0.254: T1.10 12.573,-26.162 13.081,-25.654 R33.2
RTS_485: J2.9 U3.2 U3.3 | length 29.2
  Top w0.254: J2.9 v1(22.286,-0.133)
  Bottom w0.254: U3.2 3.736,-13.242 4.191,-12.787 4.191,-11.972 ; U3.3 4.191,-11.972 ; v1(22.286,-0.133) 20.387,-2.032 13.048,-2.032 4.191,-10.889 4.191,-11.972
SD0_CLK: J2.14 J7.5 RP6.7 | length 25.1
  Top w0.254: J2.14 v1(19.299,-0.696) ; RP6.7 v1(23.954,13.551)
  Bottom w0.254: v1(19.299,-0.696) 20.297,-0.696 22.606,1.613 22.606,6.063 21.409,7.261 21.409,12.037 22.923,13.551 v1(23.954,13.551) 25.394,13.551 26.797,12.147 J7.5
SD0_CMD: J2.13 J7.3 RP7.3 | length 16.9
  Top w0.254: J2.13 23.644,1.788 23.644,5.966 24.663,6.985 26.691,6.985 v1(27.055,6.621) RP7.3
  Bottom w0.254: 27.051,9.885 J7.3 ; v1(27.055,6.621) 27.055,9.885
SD0_DATA0: J2.17 J7.7 RP6.5 | length 20.1
  Top w0.254: J2.17 v1(22.058,2.037) ; RP6.5 v1(23.424,14.101)
  Bottom w0.254: v1(22.058,2.037) 22.058,5.969 20.955,7.073 20.955,12.225 22.831,14.101 v1(23.424,14.101) 25.761,14.101 ; 25.762,14.1 J7.7
SD0_DATA1: J2.18 J7.8 RP6.3 | length 24.2
  Top w0.254: J2.18 v1(18.799,0.17) ; RP6.3 v1(23.954,14.601)
  Bottom w0.254: v1(18.799,0.17) 20.363,0.17 21.528,1.335 21.528,5.857 20.501,6.885 20.501,12.413 22.689,14.601 v1(23.954,14.601) ; v1@23.957,14.598 J7.8
SD0_DATA2: J2.16 J7.1 RP7.7 | length 21.1
  Top w0.254: v1(16.882,-1.509) J2.16 ; RP7.7 v1(28.105,6.621)
  Bottom w0.254: v1(16.882,-1.509) 20.126,-1.509 23.097,1.462 23.097,4.926 24.267,6.096 27.58,6.096 v1(28.105,6.621) 28.093,6.633 28.093,7.925 J7.1
SD0_DATA3: J2.15 J7.2 RP7.5 | length 16.5
  Top w0.254: J2.15 23.131,2.072 23.131,6.095 24.529,7.493 27.235,7.493 v1(27.555,7.173) RP7.5
  Bottom w0.254: 27.554,8.903 J7.2 ; v1(27.555,7.173) 27.555,8.903
SD0_INS: J1.35 J7.CD RP6.1 | length 64.6
  Top w0.254: J1.35 -8.628,-11.176 -7.112,-11.176 v1(-2.373,-15.915) ; RP6.1 v1(23.424,15.151)
  PWR w0.254: v1(23.424,15.151) 22.831,14.558 22.831,6.76 v1(24.257,5.334)
  Bottom w0.254: v1(-2.373,-15.915) -1.699,-15.24 3.81,-15.24 5.484,-13.566 5.484,-10.239 13.237,-2.486 20.744,-2.486 23.551,0.321 23.551,4.628 v1(24.257,5.334) ; v1(23.424,15.151) 24.118,15.845 24.157,15.845 J7.CD
TDN_OUT1: J2.3 J4.27 | length 38.8
  Top w0.254: v1@-0.75,17.557 v1(-0.75,17.55) -0.75,16.586 v1(8.351,7.485) ; J2.3 v1(23.241,-1.307)
  PWR w0.254: v1(8.351,7.485) 8.351,2.825 13.843,-2.667 17.272,-2.667 18.632,-1.307 v1(23.241,-1.307)
  Bottom w0.254: v1(-0.75,17.55) J4.27
TDN_OUT2: J2.6 J4.28 | length 36.6
  Top w0.254: v1(-1.25,20.066) -1.25,16.363 7.874,7.239 v1(7.874,6.502) ; v1(18.15,-3.664) J2.6
  PWR w0.254: v1(7.874,6.502) 7.874,2.66 13.709,-3.175 17.661,-3.175 v1(18.15,-3.664)
  Bottom w0.254: v1(-1.25,20.066) J4.28
TPRX+: J1.48 T1.1 | length 27.3
  Top w0.254: J1.48 -13.728,-10.647 -13.728,-8.902 -12.138,-7.312 -7.547,-7.312 2.3,-17.159 v1(4.969,-17.159)
  Bottom w0.254: T1.1 v1(4.969,-17.159)
TPRX-: J1.50 T1.3 | length 30.2
  Top w0.254: J1.50 -14.182,-10.197 -14.182,-8.714 -12.326,-6.858 -7.359,-6.858 2.363,-16.58 6.928,-16.58 v1(7.507,-17.159)
  Bottom w0.254: T1.3 v1(7.507,-17.159)
TPRXN_CON: J3.4 T1.14 | length 7.2
  Top w0.254: J3.4 v1(11.96,-25.517)
  Bottom w0.254: T1.14 7.493,-26.289 8.265,-25.517 v1(11.96,-25.517)
TPRXP_CON: J3.3 T1.16 | length 11.3
  Top w0.254: J3.3 v1(13.129,-25.019)
  Bottom w0.254: T1.16 4.953,-26.035 5.969,-25.019 v1(13.129,-25.019)
TPTX+: J1.49 T1.6 | length 29.4
  Top w0.254: J1.49 -10.844,-8.381 -8.763,-8.381 -7.874,-8.382 1.886,-18.142 10.334,-18.142 v1(11.317,-17.159)
  Bottom w0.254: T1.6 v1(11.317,-17.159)
TPTX-: J1.47 T1.8 | length 31.9
  Top w0.254: J1.47 -10.582,-8.836 -8.062,-8.836 1.698,-18.596 12.42,-18.596 v1(13.857,-17.159)
  Bottom w0.254: T1.8 v1(13.857,-17.159)
TPTXN_CON: J3.6 T1.9 | length 7
  Top w0.254: J3.6 9.777,-26.799 ; 9.779,-26.797 13.398,-26.797 v1@13.874,-26.32 ; v1@13.843,-26.32 v1@13.843,-26.289
  Bottom w0.254: T1.9 v1@13.843,-26.289
  other v1: 13.843,-26.162
TPTXP_CON: J3.5 T1.11 | length 2.6
  Top w0.254: J3.5 v1(10.823,-26.035)
  Bottom w0.254: v1(10.823,-26.035) 11.063,-26.035 11.303,-26.275 T1.11@11.303,-26.924
TRX_N: J9.5 R23.2 R26.2 | length 14.3
  Top w0.254: R23.2 18.88,-13.242 ; 18.88,-13.252 J9.5 v1(23.507,-16.129)
  Bottom w0.254: v1(23.507,-16.129) 24.246,-16.868 R26.2
TRX_P: J9.6 R26.1 R29.2 | length 13.9
  Top w0.254: R29.2 12.176,-14.524 12.603,-14.097 17.872,-14.097 J9.6 v1(22.86,-17.199)
  Bottom w0.254: v1(22.86,-17.199) 23.293,-17.632 R26.1
UART0_RXD: J1.34 TP1.1 | length 13.9
  Top w0.254: TP1.1 -20.412,-14.824 -13.998,-14.824 J1.34
UART0_TXD: J1.36 TP2.1 | length 14.4
  Top w0.254: TP2.1 -23.742,-17.392 -20.648,-14.298 -14.085,-14.298 J1.36
UART1_RXD: J1.4 R31.1 | length 12
  Top w0.254: J1.4 v1(-7.943,-20.012)
  Bottom w0.254: v1(-7.943,-20.012) -4.552,-20.012 -3.102,-18.562 -3.102,-15.681 -1.933,-14.512 R31.1
UART1_TXD: J1.12 R25.1 U3.4 | length 20.3
  Top w0.254: J1.12 v1(-8.943,-18.28)
  Bottom w0.254: v1(-8.943,-18.28) -7.665,-19.558 -4.74,-19.558 -3.556,-18.374 -3.556,-12.45 -1.808,-10.702 U3.4
USB_DN: J1.15 J11.2 | length 10.7
  Top w0.254: J11.2 -12.047,-23.028 v1(-12.047,-21.089) ; v1(-8.959,-17.113) J1.15
  Bottom w0.254: v1(-12.047,-21.089) -10.591,-21.089 -9.995,-20.493 -9.995,-18.149 v1(-8.959,-17.113)
USB_DP: J1.14 J11.3 | length 6.9
  Top w0.254: J11.3 -12.697,-21.567 -12.697,-19.836 ; -12.7,-19.836 J1.14
USB_VBUS: J1.16 R7.1 R8.1 | length 6.9
  Top w0.254: v1(-14.469,-20.264) J1.16
  Bottom w0.254: R7.1@-15.425,-21.648 -15.425,-20.32 -15.369,-20.264 v1(-14.469,-20.264)
USB_VBUS_EN: J1.3 R16.1 | length 6.7
  Top w0.254: J1.3 -4.572,-18.074 -2.373,-18.074 -1.524,-18.923 R16.1
USB_VBUS_OCN: J1.42 R17.1 | length 2.7
  Top w0.254: R17.1 -15.127,-13.166 J1.42
VD_CS: J1.11 J4.37 | length 44.1
  Top w0.254: J1.11 v1(-5.855,-16.502)
  PWR w0.254: v1(-8.38,-5.387) -8.38,-5.336 -8.634,-5.082 -10.031,-5.082 -13.335,-1.778 -13.335,9.965 v1(-5.75,17.55)
  Bottom w0.254: v1(-8.38,-5.387) -6.185,-7.583 -6.185,-15.544 -5.855,-15.873 v1(-5.855,-16.502) ; v1(-5.75,17.55) J4.37
VD_D0: J2.35 J4.11 | length 24.5
  Top w0.254: v1(7.25,19.939) 8.682,18.507 11.345,18.507 20.287,9.565 20.287,6.248 20.193,6.153 J2.35
  Bottom w0.254: J4.11 v1(7.25,19.939)
VD_D1: J2.33 J4.12 | length 27.2
  Top w0.254: v1(6.75,22.479) 10.268,18.961 11.533,18.961 20.828,9.666 20.828,5.939 J2.33
  Bottom w0.254: J4.12 v1(6.75,22.479)
VD_D2: J2.40 J4.13 | length 21.1
  Top w0.254: v1(8.117,14.605) 8.754,14.605 10.449,12.91 10.449,5.149 12.153,3.445 13.462,3.445 J2.40
  Bottom w0.254: J4.13 6.25,16.472 v1(8.117,14.605)
VD_D3: J2.36 J4.14 | length 25.5
  Top w0.254: v1@8.382,13.643 9.541,12.484 9.541,4.517 9.699,4.359 9.723,4.359 10.002,4.079 10.002,4.056 11.713,2.345 13.554,2.345 13.58,2.36 J2.36
  Bottom w0.254: J4.14 5.75,16.221 v1(8.382,13.589)
VD_D4: J2.38 J4.16 | length 25.9
  Top w0.254: v1(7.004,14.097) 8.57,14.097 9.995,12.672 9.995,4.806 11.919,2.882 13.485,2.882 J2.38
  Bottom w0.254: J4.16 4.75,16.351 v1(7.004,14.097)
VD_D5: J2.37 J4.17 | length 26.3
  Top w0.254: v1(4.25,19.939) 6.136,18.053 11.157,18.053 19.75,9.46 19.75,6.477 J2.37
  Bottom w0.254: J4.17 v1(4.25,19.939)
VD_D6: J2.41 J4.18 | length 26
  Top w0.254: v1(3.75,17.145) 10.554,17.145 18.62,9.079 18.62,6.985 J2.41
  Bottom w0.254: v1(3.75,17.145) J4.18
VD_D7: J2.39 J4.19 | length 27.9
  Top w0.254: v1(3.25,19.939) 5.59,17.599 10.969,17.599 19.195,9.373 19.195,6.736 19.038,6.647 ; 19.046,6.652 19.038,6.647 ; 19.038,6.647 19.02,6.637 J2.39 19.038,6.647
  Bottom w0.254: J4.19 v1(3.25,19.939)
VD_D8: J2.44 J4.21 | length 23.7
  Top w0.254: v1(4.064,15.621) 9.275,15.621 11.357,13.539 11.357,5.527 12.31,4.573 ; 12.31,4.572 13.415,4.572 J2.44
  Bottom w0.254: J4.21@2.255,18.695 J4.21 2.25,17.435 v1(4.064,15.621)
VD_D9: J2.46 J4.22 | length 26.5
  Top w0.254: v1(2.762,16.129) 9.525,16.129 11.811,13.843 11.811,5.715 12.416,5.11 13.348,5.11 J2.46
  Bottom w0.254: J4.22 1.75,17.141 v1(2.762,16.129)
VD_D10: J2.42 J4.23 | length 25.5
  Top w0.254: v1(1.905,16.129) 2.921,15.113 9.017,15.113 10.903,13.227 10.903,5.337 12.205,4.035 13.485,4.035 13.513,4.051 13.522,4.057 J2.42
  Bottom w0.254: J4.23 1.25,16.784 v1(1.905,16.129)
VD_D11: J2.43 J4.24 | length 27.9
  Top w0.254: v1(0.75,17.145) 1.258,16.637 10.42,16.637 18.161,8.896 18.161,7.299 J2.43
  Bottom w0.254: v1(0.75,17.145) J4.24
VD_HS: J2.45 J4.6 | length 18
  Top w0.254: v1(16.03,9.652) 17.668,8.014 17.668,7.594 J2.45
  Bottom w0.254: J4.6 9.75,16.862 16.03,10.582 v1(16.03,9.652)
VD_PCLK: J2.50 J4.9 | length 14.4
  Top w0.254: J2.50@13.97,6.637 v1(13.97,7.239)
  Bottom w0.254: J4.9 8.25,16.436 13.97,10.716 v1(13.97,7.239)
VD_RSTN: J1.1 J4.36 | length 50
  Top w0.254: J1.1 v1(-5.126,-18.992)
  PWR w0.254: v1(-9.652,-5.715) -11.176,-5.715 -14.351,-2.54 -14.351,10.965 v1(-5.25,20.066)
  Bottom w0.254: v1(-9.652,-5.715) -7.152,-8.215 -7.152,-16.966 v1(-5.126,-18.992) ; v1(-5.25,20.066) J4.36
VD_SCK: J1.8 J4.35 | length 44.4
  Top w0.254: v1(-10.513,-20.32) J1.8
  PWR w0.254: v1(-10.751,-3.557) -10.769,-3.557 -12.7,-1.626 -12.7,9.6 v1(-4.75,17.55)
  Bottom w0.254: v1(-10.751,-3.557) -10.751,-19.348 -10.513,-19.586 v1(-10.513,-20.32) ; v1(-4.75,17.55) J4.35
VD_SIMO: J1.10 J4.34 | length 48.2
  Top w0.254: v1(-11.205,-20.138) J1.10
  PWR w0.254: v1(-11.619,-4.242) -13.843,-2.018 -13.843,10.473 v1(-4.25,20.066)
  Bottom w0.254: v1(-11.619,-4.242) -11.205,-4.656 v1(-11.205,-20.138) ; v1(-4.25,20.066) J4.34
VD_SOMI: J1.13 J4.38 | length 47.8
  Top w0.254: J1.13 v1(-6.639,-16.372)
  PWR w0.254: v1(-8.382,-6.195) -11.712,-6.195 -14.897,-3.01 -14.897,11.225 -6.25,19.872 v1(-6.25,20.066)
  Bottom w0.254: v1(-8.382,-6.195) -6.639,-7.939 v1(-6.639,-16.372) ; v1@-6.25,20.093 J4.38
VD_VS: J2.47 J4.7 | length 15.5
  Top w0.254: v1(15.508,6.935) J2.47
  Bottom w0.254: J4.7 9.25,16.72 15.508,10.462 v1(15.508,6.935)
ZOOM_AN: J12.2 U4.6 | length 23.8
  Top w0.254: v1(-7.893,24.511) -12.116,20.288 -12.116,13.421 -8.956,10.261 -6,10.261 v1(-5.405,9.666)
  Bottom w0.254: J12.2 v1(-7.893,24.511) ; U4.6 v1(-5.405,9.666)
ZOOM_AP: J12.1 U4.4 | length 26.4
  Top w0.254: v1(-8.001,27.658) -8.001,25.273 -12.57,20.704 -12.57,13.233 -9.003,9.666 v1(-6.705,9.666)
  Bottom w0.254: v1(-8.001,27.658) J12.1 ; U4.4 v1(-6.705,9.666)
ZOOM_BN: J12.7 U4.7 | length 20.5
  Top w0.254: v1(-11.639,19.789) -11.639,13.586 -8.768,10.715 -5.442,10.715 v1(-4.755,10.028)
  Bottom w0.254: J12.7 -13.6,21.773 -13.6,21.75 v1(-11.639,19.789) ; U4.7 v1(-4.755,10.028)
ZOOM_BP: J12.8 U4.9 | length 21.1
  Top w0.254: v1(-11.157,17.653) -11.157,13.746 -8.587,11.176 -4.965,11.176 v1(-3.455,9.666)
  Bottom w0.254: J12.8 -14.761,21.256 v1(-11.157,17.653) ; U4.9 v1(-3.455,9.666)
ZOOM_CTRL_CLK: J2.28 U4.11 | length 24
  Top w0.254: v1(-2.155,9.666) 1.759,9.666 10.869,0.556 14.455,0.556 J2.28
  Bottom w0.254: U4.11 v1(-2.155,9.666)
ZOOM_CTRL_DIR: J2.32 U4.12 | length 23.5
  Top w0.254: v1(-1.505,10.216) 1.976,10.216 11.136,1.056 13.276,1.056 J2.32
  Bottom w0.254: U4.12 v1(-1.505,10.216)
ZOOM_CTRL_EN: J2.25 U4.10 | length 30.8
  Top w0.254: J2.25 v1@20.784,3.614
  Bottom w0.254: U4.10 -2.805,9.895 -1.927,10.773 1.452,10.773 7.069,5.157 20.497,5.157 20.833,4.821 v1(20.833,3.663)
ZOOM_CTRL_NFAULT: J2.19 R27.1 U4.16 | length 28.7
  Top w0.254: v1(-3.455,1.31) R27.1 v1(7.848,0.323) ; J2.19 v1(21.036,2.032)
  Bottom w0.254: v1(-3.455,1.31) U4.16 ; v1(7.848,0.323) 15.944,0.323 17.372,1.751 20.755,1.751 v1(21.036,2.032)
ZOOM_CTRL_NSLEEP: J2.22 U4.1 | length 30.8
  Top w0.254: v1(-8.655,7.131) -4.301,7.131 0.544,2.286 7.105,2.286 10.29,-0.899 14.935,-0.899 J2.22
  Bottom w0.254: v1(-8.655,7.131) U4.1
pads on no net: J1.6 J1.18 J1.19 J1.20 J1.21 J1.23 J1.25 J1.38 J1.40 J2.5 J2.7 J2.20 J4.4 J4.29 J4.32 RP7.1

## Polygon pours and split planes (outlines as drawn)
+3.3V on PWR "PWR-+3.3V" (solid, remove dead copper, pour order 12): 15.875,36.703 36.449,16.51 37.084,-16.256 16.002,-33.401 -24.257,-33.274 -38.481,-11.557 -36.195,27.559 -14.351,35.052
MVDD on PWR "PWR-MVDD" (solid, pour order 8): -9.525,12.775 -12.048,10.251 -12.048,2.523 -1.524,-8.001 6.477,-8.001 7.62,-6.858 7.62,3.683 -1.472,12.775
GND on GND "GND-GND" (solid, remove dead copper, pour order 6): 30.598,42.024 36.821,5.702 33.646,-32.652 -6.74,-41.415 -33.41,-24.524 -40.522,7.988 -16.773,34.404
GND on Top "Top_GND" (solid, remove dead copper, pour order 4): -35.092,41.362 -36.957,39.497 -36.957,-22.225 -24.003,-37.465 33.782,-37.465 34.29,-36.957 36.703,30.988
GND on Bottom "Bottom-No Net" (solid, remove dead copper, pour order 2): -33.909,44.704 -35.179,43.434 -35.179,28.956 -35.179,-41.021 -32.004,-44.196 -30.099,-46.101 29.718,-46.101 31.496,-46.101 34.671,-42.926 33.655,-41.91 33.655,41.783 33.655,43.307 33.528,43.434

## Keep-outs
Top:
  lines w0.254: -12.519,9.779 -12.519,2.966 -10.188,0.635 -2.263,-7.29 6.761,-7.29 7.026,-7.026
GND:
  lines w0.254: -12.606,3.208 -0.889,-8.509 5.969,-8.509 10.617,-3.861 10.617,1.627 -0.584,12.827 -9.254,12.827 -12.606,9.475 -12.606,7.493 -12.606,3.208
Bottom:
  lines w0.254: -12.645,5.461 -12.645,3.254 -12.249,2.858 ; -12.574,7.493 -12.574,9.76 -9.507,12.827 -0.582,12.827 0.942,11.303 ; -9.544,1.651 -9.544,-0.506 -6.394,-3.656 -3.867,-3.656 1.61,-9.133 5.155,-9.133 ; 8.309,-5.895 8.309,-0.199 ; 8.309,0.889 8.309,3.711
Keep-Out Layer:
  circle w0.254: c0,0 r33.085

## Other copper
Top:
  pour cut-out: 20.978,-17.618 18.6,-15.24 13.145,-15.24 11.713,-13.808 11.713,-9.98 14.581,-7.112 23.178,-7.112 26.543,-10.477 26.543,-15.316 24.235,-17.623
  region net N17371906: 15.417,-21.463 16.129,-22.91 15.639,-23.495 15.244,-23.586 14.332,-21.783 14.735,-21.597
  region net +3.3V: -27.094,-10.833 -27.368,-11.107 -27.368,-12.701 -26.388,-13.682 -22.826,-13.682 -22.098,-12.954 -22.098,-12.144 -23.409,-10.833
Bottom:
  pour cut-out: -4.489,-20.701 -4.489,-24.353 2.711,-24.353 2.711,-20.701
  pour cut-out: 1.551,-10.187 1.249,-10.489 1.249,-14.649 1.84,-15.24 13.894,-15.24 14.409,-14.725 14.409,-10.832 9.525,-10.824 9.168,-11.139 6.807,-11.134 5.86,-10.187
  pour cut-out: 14.526,-9.779 12.319,-11.986 12.319,-13.981 13.578,-15.24 17.961,-15.24 18.596,-15.875 18.699,-15.772 22.026,-15.772 23.241,-14.557 23.241,-11.319 21.701,-9.779
  region net +3.3V: -27.432,-11.16 -27.432,-12.608 -26.289,-13.751 -22.895,-13.751 -22.098,-12.954 -22.098,-11.16
  region net +3.3V: -11.384,0.127 -11.855,-0.344 -11.855,-1.338 -11.723,-1.47 -10.289,-1.47 -10.089,-1.27 -10.089,-0.444 -10.66,0.127
  region net MVDD: -11.738,3.81 -11.855,3.692 -11.855,2.049 -11.457,1.651 -10.597,1.651 -10.092,2.156 -10.092,3.55 -10.352,3.81
  pour cut-out: -20.574,-5.524 -28.368,-5.524 -28.368,-13.716 -20.574,-13.716

## Silkscreen, mask and mechanical layers (free items; w line width, h text height)
Solder Mask Top:
  circle w1: c0,0 r32.5
Solder Mask Bottom:
  circle w1: c0,0 r32.5